# Altium PCB SeaTurtleIO.PcbDoc
Units mm, origin at the board's own origin, x right, y up, seen from the top; angles counter-clockwise.
Board outline 85 x 85 mm, 4 copper layers (Top Layer, Mid Layer 1, MId Layer 2, Bottom Layer), stack 0.778 mm thick; 117 components, 82 nets, 381 pads, 202 vias.
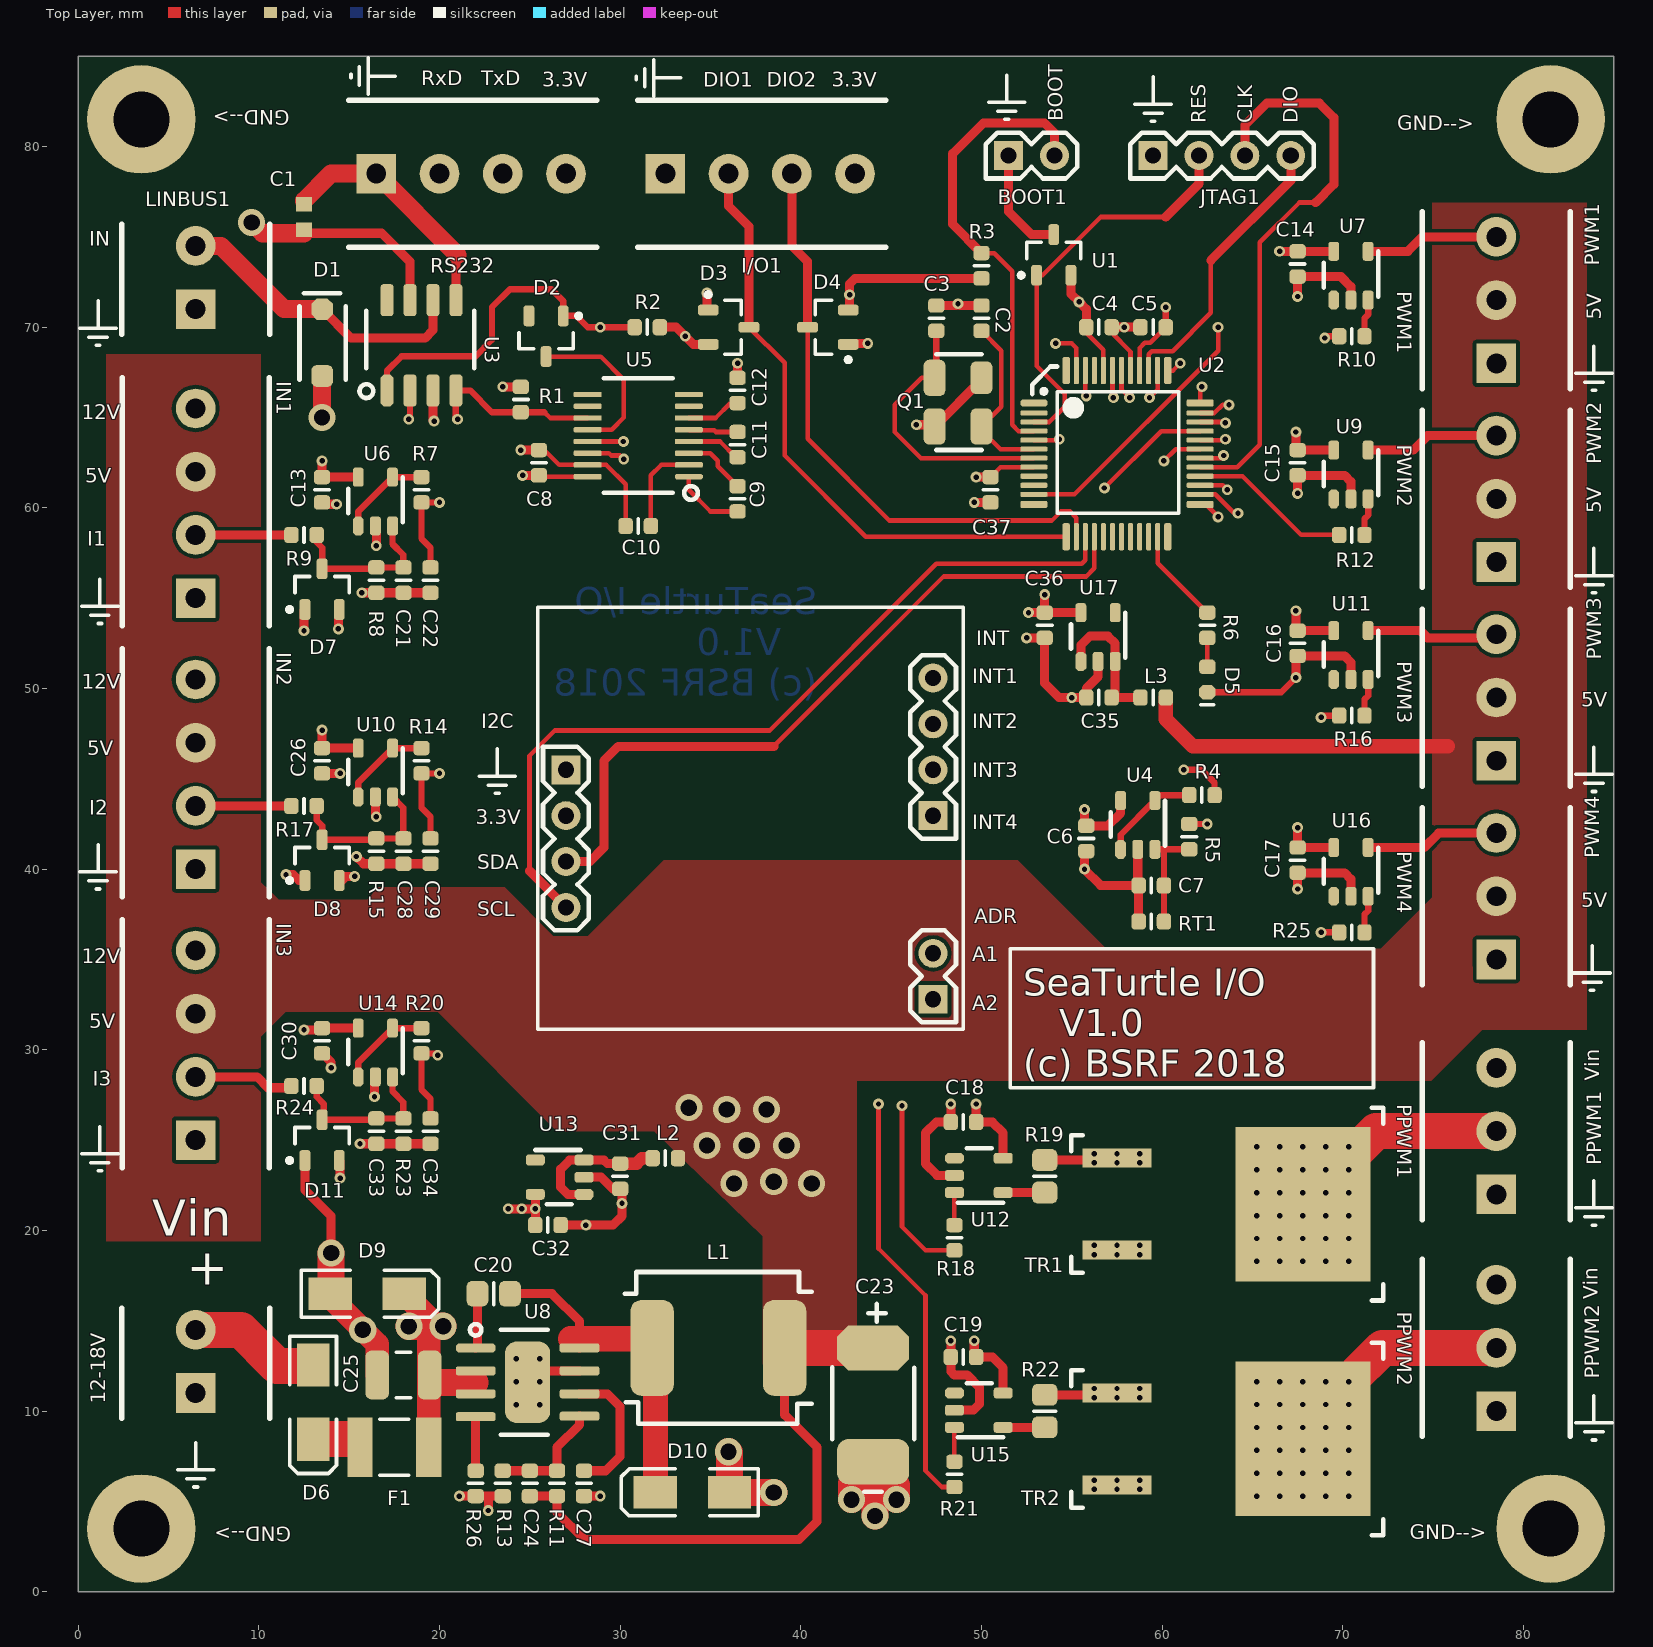
[diagram p0: Top Layer view]
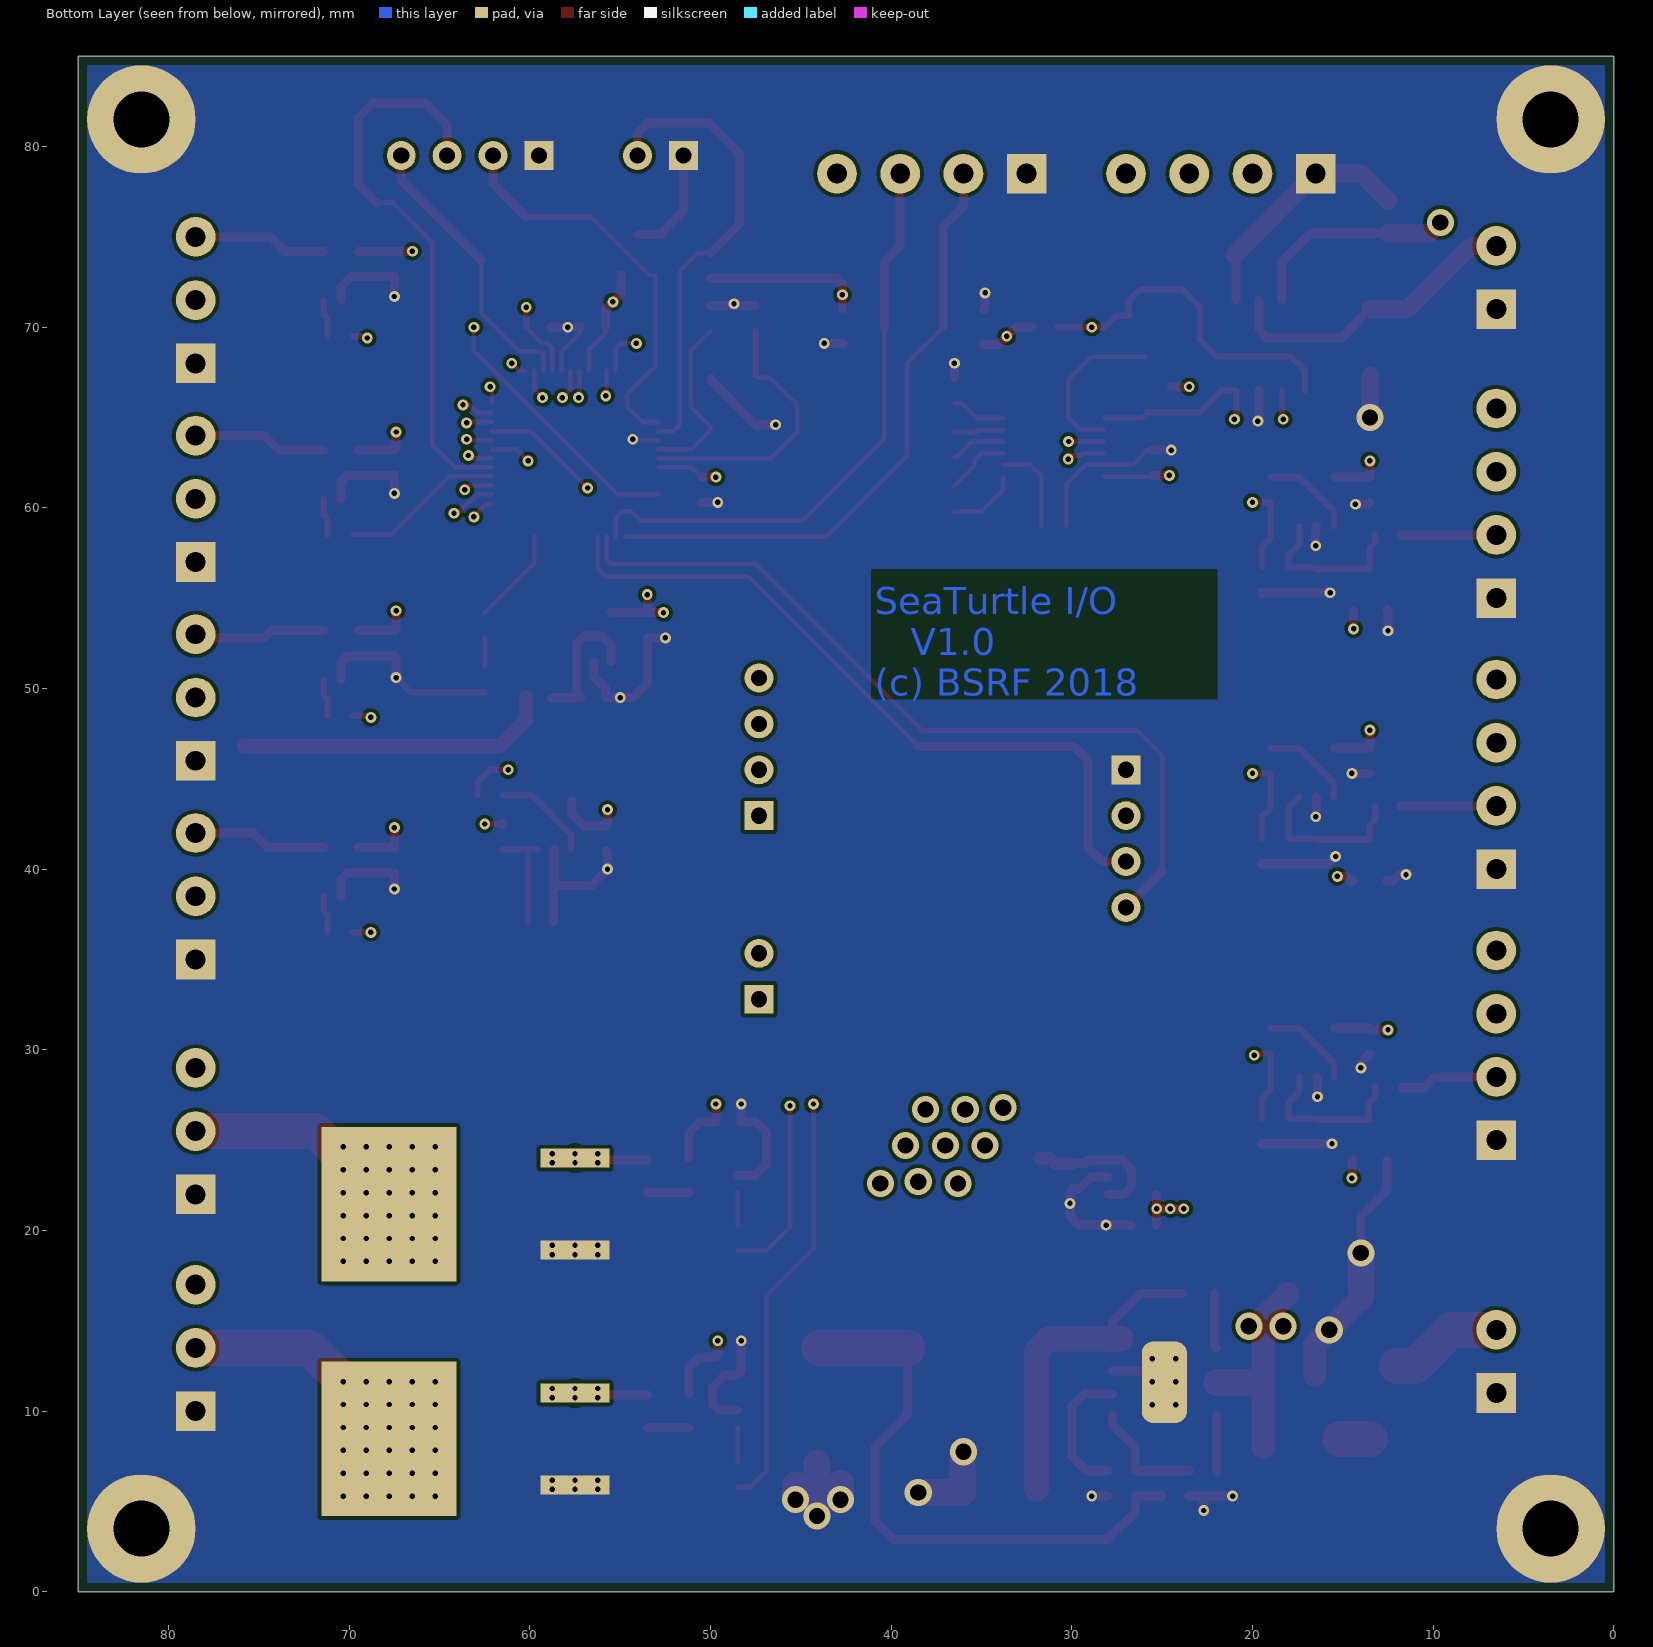
[diagram p1: Bottom Layer view, seen from below]
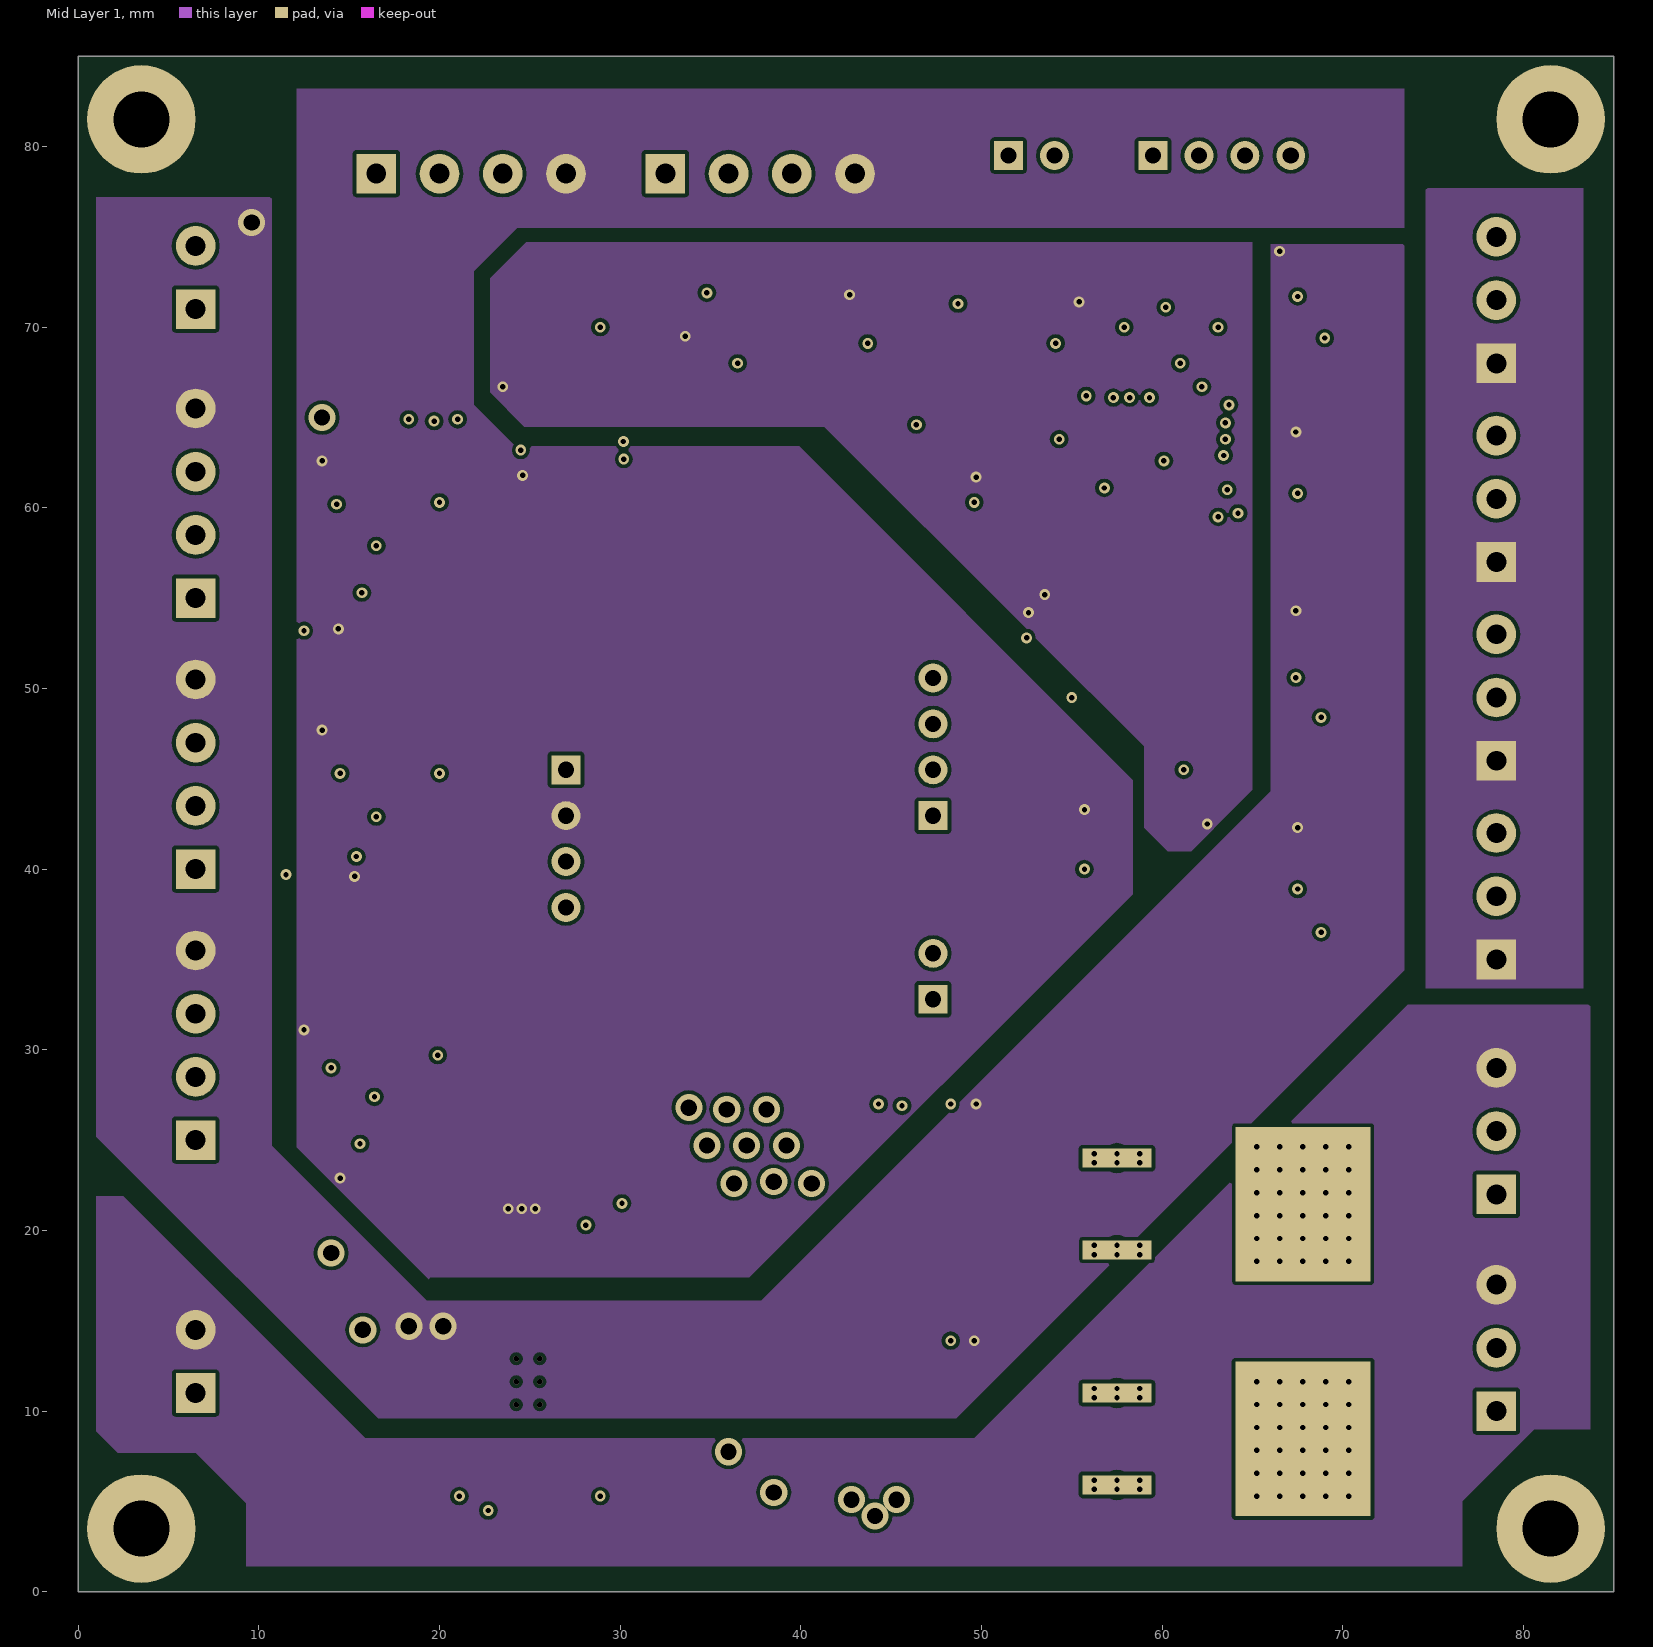
[diagram p2: Mid Layer 1]
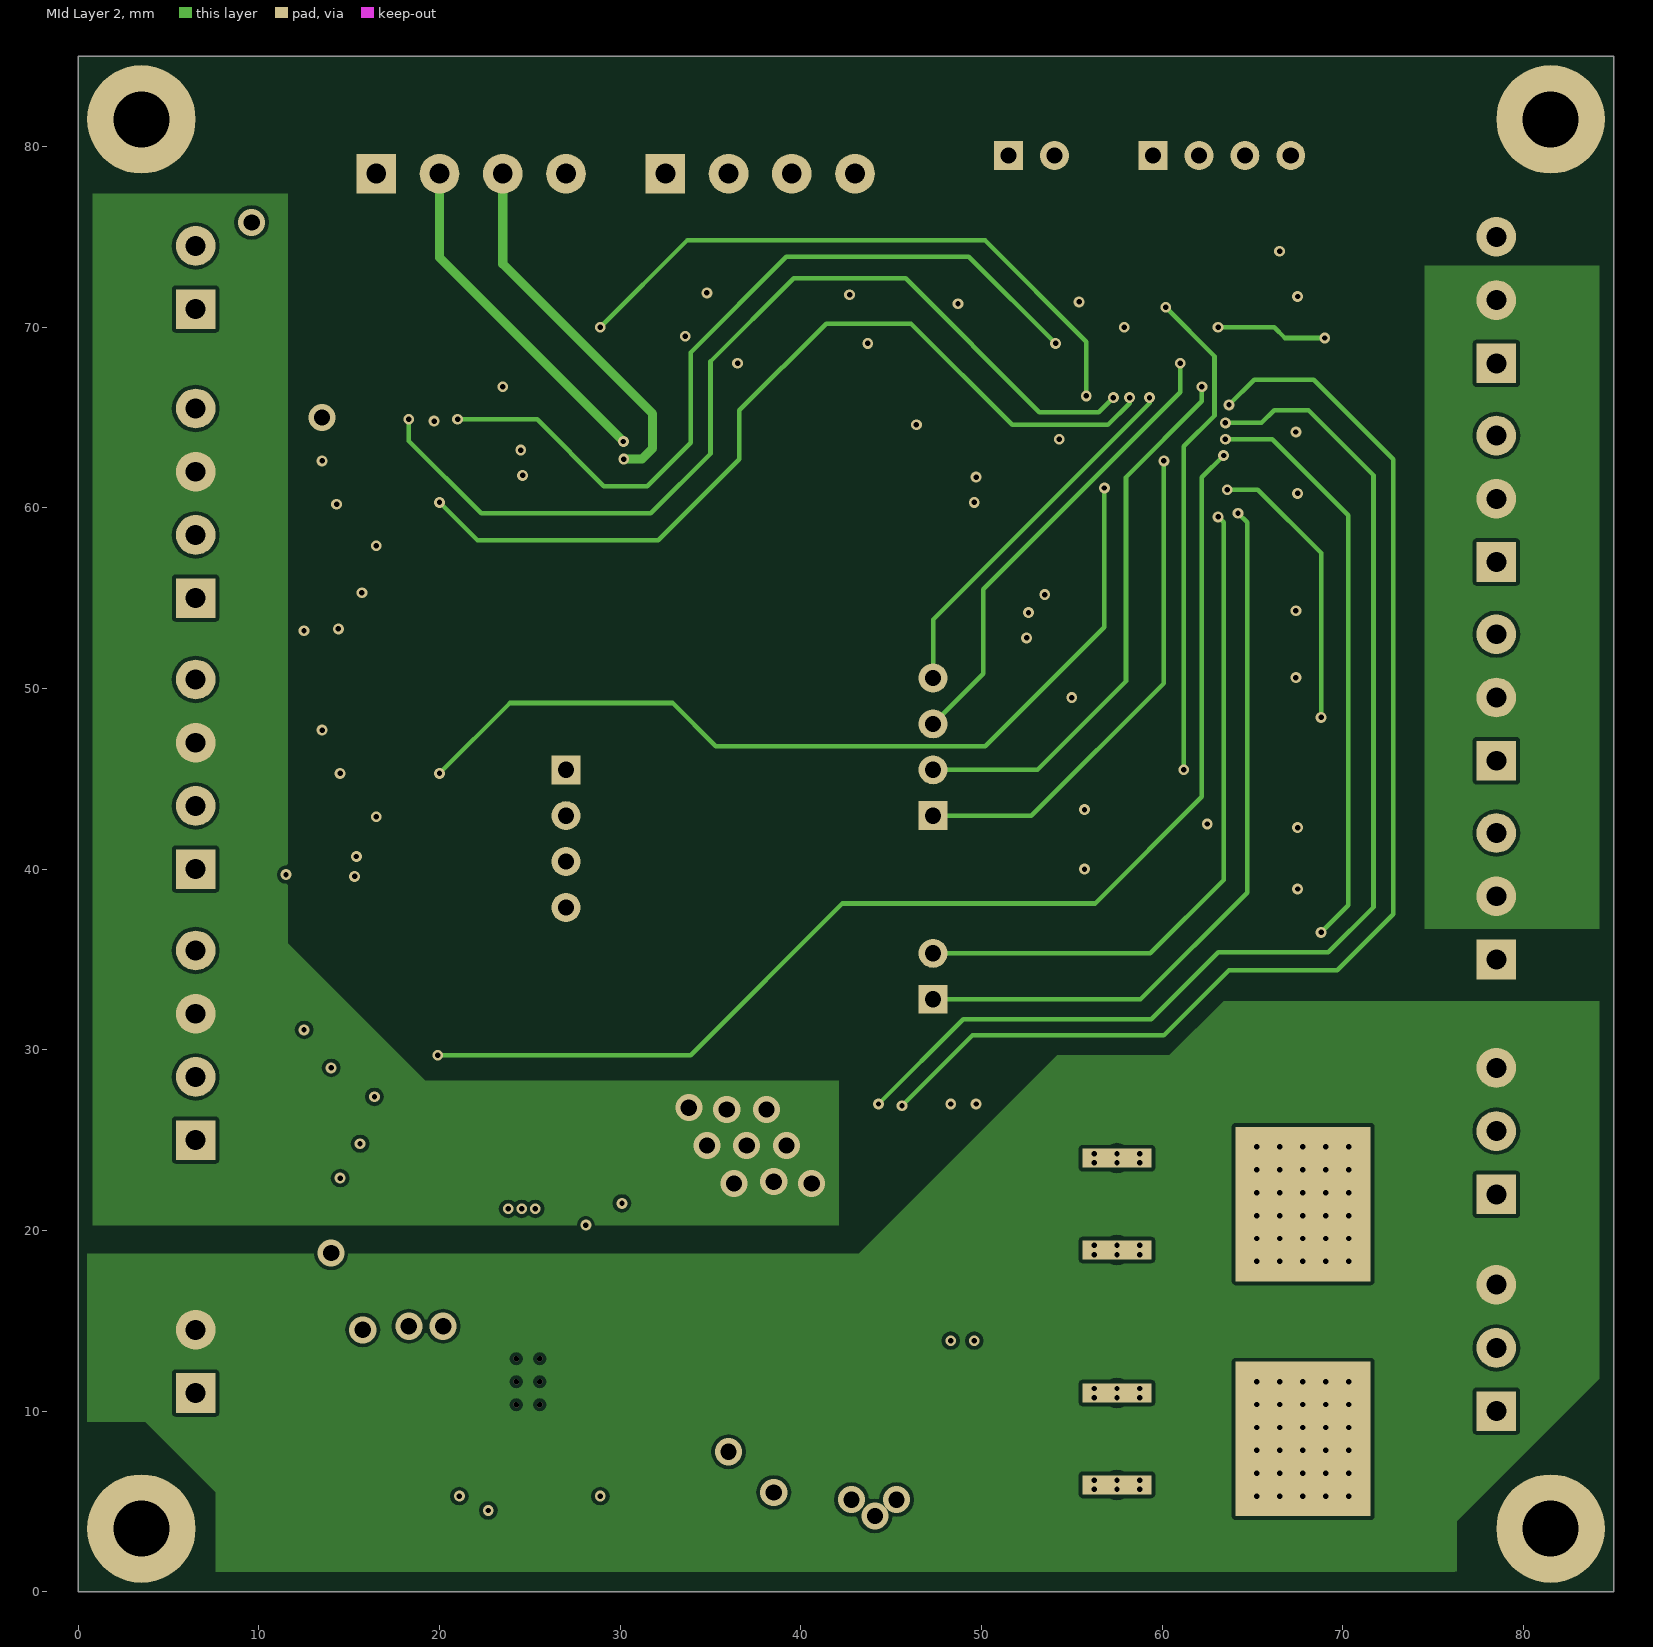
[diagram p3: MId Layer 2]

## Layer stack, top to bottom
Top Solder: solder mask 0.0102, Solder Resist, Dk 3.5
Top Layer: signal copper 0.0356
Dielectric 1: core 0.254, FR-4, Dk 4.2
Mid Layer 1: signal copper 0.036
Dielectric 4: prepreg 0.127, Dk 4.2
MId Layer 2: signal copper 0.036
Dielectric 3: core 0.254, Dk 4.2
Bottom Layer: signal copper 0.0356
Bottom Solder: solder mask 0.0102, Solder Resist, Dk 3.5

## Board outline
0,0 0,85 85,85 85,0

## Design rules (kind name [scope] priority, off if disabled: settings)
Clearance [All] p1: gap=0.2 ignorepadtopadclearanceinfootprint=TRUE
PolygonConnect PolygonConnect_2 [All vs IsNamedPolygon('Mid1_GND')] p1: connectstyle=Direct reliefconductorwidth=0.254 reliefentries=4 polygonreliefangle="90 Angle" airgapwidth=0.254
PolygonConnect PolygonConnect_1 [All vs IsNamedPolygon('MID1_12V') Or  IsNamedPolygon('Mid1_5V_3') Or  IsNamedPolygon('Mid1_5V_2') Or  IsNamedPolygon('Top_5V_2') Or  IsNamedPolygon('Bottom_GND') Or  IsNamedPolygon('MID1_3.3V_PER') Or  IsNamedPolygon('MID1_3.3V_CPU') Or  IsNamedPolygon('Top_5_1') Or  IsNamedPolygon('Mid1_5V_1') Or  IsNamedPolygon('Mid1_Vin')] p2: connectstyle=Direct reliefconductorwidth=0.254 reliefentries=4 polygonreliefangle="90 Angle" airgapwidth=0.254
PolygonConnect [All] p3: connectstyle=Relief reliefconductorwidth=0.254 reliefentries=4 polygonreliefangle="90 Angle" airgapwidth=0.254
RoutingVias [All] p1: holewidth=0.711 width=1.27 viastyle="Through Hole" minholewidth=0.711 minwidth=1.27 maxholewidth=0.711 maxwidth=1.27
SolderMaskExpansion [All] p1: expansion=0.102
Width [All] p1: maxlimit=2 minlimit=0.2 preferedwidth=0.254
30 further rules are at their usual default settings.

## Components (designator, comment, footprint, x,y, rotation, side; value= is the part's Value field where it differs from the comment)
ADR "2.54mm HEADER 2 PIN" CON-SRS-2-0254 47.32,32.8 r90 top locked
BOOT1 "2.54mm HEADER 2 PIN" CON-SRS-2-0254 51.5,79.5 r0 top
C1 "10uF" 1608[0603]#1 12.5,76.1 r90 top
C2 "10pF" 1608[0603]#2 50,70.5 r270 top
C3 "10pF" 1608[0603]#2 47.5,70.5 r270 top
C4 "10uF" 1608[0603]#2 56.5,70 r0 top
C5 "10uF" 1608[0603]#2 59.5,70 r0 top
C6 "10uF" 1608[0603]#2 55.8,41.7 r270 top
C7 "10uF" 1608[0603]#2 59.4,39.1 r180 top
C8 "10uF" 1608[0603]#2 25.5,62.5 r90 top
C9 "100nF" 1608[0603]#2 36.5,60.5 r270 top
C10 "100nF" 1608[0603]#2 31,59 r0 top
C11 "100nF" 1608[0603]#2 36.5,63.5 r270 top
C12 "100nF" 1608[0603]#2 36.5,66.5 r270 top
C13 "10uF" 1608[0603]#2 13.5,61 r270 top
C14 "10uF" 1608[0603]#2 67.5,73.5 r270 top
C15 "10uF" 1608[0603]#2 67.5,62.5 r270 top
C16 "10uF" 1608[0603]#2 67.5,52.5 r270 top
C17 "10uF" 1608[0603]#2 67.5,40.5 r270 top
C18 "10uF" 1608[0603]#2 49,26 r180 top
C19 "10uF" 1608[0603]#2 49,13 r180 top
C20 "100nF" 0805_N_2 23,16.5 r0 top
C21 "10uF" 1608[0603]#2 18,56 r270 top
C22 "10uF" 1608[0603]#2 19.5,56 r270 top
C23 "200uF" TANT_CASE_E 44,13.5 r270 top
C24 "270pF" 1608[0603]#2 25,6 r90 top
C25 "10uF" C1210_N 18,12 r180 top
C26 "10uF" 1608[0603]#2 13.5,46 r270 top
C27 "8.2nF" 1608[0603]#2 28,6 r270 top
C28 "10uF" 1608[0603]#2 18,41 r270 top
C29 "10uF" 1608[0603]#2 19.5,41 r270 top
C30 "10uF" 1608[0603]#2 13.5,30.5 r270 top
C31 "10uF" 1608[0603]#2 30,23 r270 top
C32 "10uF" 1608[0603]#2 26,20.3 r0 top
C33 "10uF" 1608[0603]#2 16.5,25.5 r270 top
C34 "10uF" 1608[0603]#2 19.5,25.5 r270 top
C35 "10uF" 1608[0603]#2 56.5,49.5 r180 top
C36 "10uF" 1608[0603]#2 53.5,53.5 r270 top
C37 "10uF" 1608[0603]#2 50.5,61 r90 top
D1 "BZT52C43" SOD123 13.5,71 r270 top
D2 "BAT54" SOT-23_N 25.9,69.5 r270 top
D3 "BAS70-4" SOT-23_N 36,70 r0 top
D4 "BAS70-4" SOT-23_N 41.5,70 r180 top
D5 "LED 0603" LED608L 62.5,50.5 r90 top
D6 "B260A" SMA 13,10.5 r270 top
D7 "BAS70-4" SOT-23_N 13.5,55.5 r90 top
D8 "BAS70-4" SOT-23_N 13.5,40.5 r90 top
D9 "SMAJ 15V" SMA 16,16.5 r0 top
D10 "B260A" SMA 34,5.5 r180 top
D11 "BAS70-4" SOT-23_N 13.5,25 r90 top
F1 "FUSE" CAPC4532L 17.5,8 r180 top
I2C "2.54mm HEADER 4 PIN" con-srs-4-0254 27,45.5 r270 top locked
I/O1 "2.54mm HEADER 4 PIN" 284391-4 32.5,78.5 r0 top
IN1 "2.54mm HEADER 4 PIN" 284391-4 6.5,55 r90 top
IN2 "2.54mm HEADER 4 PIN" 284391-4 6.5,40 r90 top
IN3 "2.54mm HEADER 4 PIN" 284391-4 6.5,25 r90 top
INT "2.54mm HEADER 4 PIN" con-srs-4-0254 47.32,42.96 r90 top locked
JTAG1 "2.54mm HEADER 4 PIN" con-srs-4-0254 59.5,79.5 r0 top
L1 "SRU1038A-6R2Y" "3232DZ (3232)" 39,13.5 r180 top
L2 "FB 1K" 1608[0603]#2 32.5,24 r180 top
L3 "FB 1K" 1608[0603]#2 59.5,49.5 r180 top
LINBUS1 "2.54mm HEADER 2 PIN" 284391-2 6.5,71 r90 top
PPWM1 "HEADER 3P S MALE" 284391-3 78.5,22 r90 top
PPWM2 "HEADER 3P S MALE" 284391-3 78.5,10 r90 top
PWM1 "HEADER 3P S MALE" 284391-3 78.5,68 r90 top
PWM2 "HEADER 3P S MALE" 284391-3 78.5,57 r90 top
PWM3 "HEADER 3P S MALE" 284391-3 78.5,46 r90 top
PWM4 "HEADER 3P S MALE" 284391-3 78.5,35 r90 top
Q1 "G-CRYS-Q12.000 MHz" "QUARTZ SMD QKT (QKT)" 50,64.5 r90 top
R1 "1K5" 1608[0603]#2 24.5,66 r270 top
R2 "1K5" 1608[0603]#2 31.5,70 r180 top
R3 "10K" 1608[0603]#2 50,73.4 r90 top
R4 "27R" 1608[0603]#2 62.2,44.1 r0 top
R5 "10K" 1608[0603]#2 61.5,41.8 r90 top
R6 "1K" 1608[0603]#2 62.5,53.5 r270 top
R7 "27R" 1608[0603]#2 19,61 r270 top
R8 "1K" 1608[0603]#2 16.5,56 r270 top
R9 "1K" 1608[0603]#2 12.5,58.5 r0 top
R10 "300R" 1608[0603]#2 70.5,69.5 r0 top
R11 "68K" 1608[0603]#2 26.5,6 r270 top
R12 "300R" 1608[0603]#2 70.5,58.5 r0 top
R13 "12K" 1608[0603]#2 23.5,6 r90 top
R14 "27R" 1608[0603]#2 19,46 r270 top
R15 "1K" 1608[0603]#2 16.5,41 r270 top
R16 "300R" 1608[0603]#2 70.5,48.5 r0 top
R17 "1K" 1608[0603]#2 12.5,43.5 r0 top
R18 "300R" 1608[0603]#2 48.5,19.6 r90 top
R19 "10R" 0805_N 53.5,23 r90 top
R20 "27R" 1608[0603]#2 19,30.5 r270 top
R21 "300R" 1608[0603]#2 48.5,6.5 r90 top
R22 "10R" 0805_N 53.5,10 r90 top
R23 "1K" 1608[0603]#2 18,25.5 r270 top
R24 "1K" 1608[0603]#2 12.5,28 r0 top
R25 "300R" 1608[0603]#2 70.5,36.5 r0 top
R26 "20.5К" 1608[0603]#2 22,6 r90 top value=20.5?
RS232 "2.54mm HEADER 4 PIN" 284391-4 16.5,78.5 r0 top
RT1 "10K THERMISTOR" 1608[0603]#2 59.4,37.1 r0 top
TR1 "CSD18536KTT" "TO-263 (D2PAK)" 57.5,24 r180 top
TR2 "CSD18536KTT" "TO-263 (D2PAK)" 57.5,11 r180 top
U1 "ADM1818" SOT-23_N 54,74 r90 top
U2 "LPC1115FBD48/303,1" LQFP48_N 57.5,63 r0 top locked
U3 "MCP2003-E/SN" "SO8 (REFLOW)" 19,69 r0 top
U4 "AD8541AKSZ" "S_SOT23-5 (REFLOW)" 57.7,41.1 r0 top
U5 "MAX3232E-Q1" TSSOP16 31,64 r90 top
U6 "AD8541AKSZ" "S_SOT23-5 (REFLOW)" 15.5,59 r0 top
U7 "UCC27519A-Q1" "S_SOT23-5 (REFLOW)" 69.5,71.5 r0 top
U8 "LMR14020" "S_SO8_POWER_PAD (wave)" 22,13.5 r270 top
U9 "UCC27519A-Q1" "S_SOT23-5 (REFLOW)" 69.5,60.5 r0 top
U10 "AD8541AKSZ" "S_SOT23-5 (REFLOW)" 15.5,44 r0 top
U11 "UCC27519A-Q1" "S_SOT23-5 (REFLOW)" 69.5,50.5 r0 top
U12 "UCC27519A-Q1" "S_SOT23-5 (REFLOW)" 48.5,24 r270 top
U13 "SPX3819M5-3.3V" "S_SOT23-5 (reflow)" 28,22 r90 top
U14 "AD8541AKSZ" "S_SOT23-5 (REFLOW)" 15.5,28.5 r0 top
U15 "UCC27519A-Q1" "S_SOT23-5 (REFLOW)" 48.5,11 r270 top
U16 "UCC27519A-Q1" "S_SOT23-5 (REFLOW)" 69.5,38.5 r0 top
U17 "SPX3819M5-3.3V" "S_SOT23-5 (reflow)" 55.5,51.5 r0 top
Vin "2.54mm HEADER 2 PIN" 284391-2 6.5,11 r90 top

## Footprints (in the part's own frame and the unit in brackets; to place one, negate y for a bottom-side part, rotate by r counter-clockwise, add the part's x,y. Pads: shape width x height; smd on the part's side, far side on the other; paste and mask are expansions set on the pad)
0805_N [mm] "Chip Resistor, Body 2.0x1.2mm, IPC Medium Density"
  rrect50% 1.2x1.4 smd: 1(-0.9,0) 2(0.9,0)
  silkscreen extent 0,-0.6 0,0.6
0805_N_2 [mm]
  rrect50% 1.2x1.4 smd: 1(-0.9,0) 2(0.9,0)
  silkscreen extent 0,-0.6 0,0.6
1608[0603]#1 [mm] "Chip Capacitor, Body 1.6x0.8mm, IPC High Density"
  rect 0.8x0.9 smd: 1(-0.7,0) 2(0.7,0)
  body extent -0.87,-0.48 0.87,0.48, height 1.3
1608[0603]#2 [mm] "Chip Capacitor, Body 1.6x0.8mm, IPC High Density"
  rrect50% 0.8x0.9 smd: 1(-0.7,0) 2(0.7,0)
  silkscreen extent 0,-0.4 0,0.4
"3232DZ (3232)" [mm]
  rrect50% 2.4x5.3 smd paste-0.1 mask+0.1: 1(-0.1,0) 2(7.23,0)
  silkscreen extent -1.6,-4.2 8.75,4.2
284391-2 [mm] "3.5mm terminal block 2-pin"
  rect 2.2x2.2 hole 1.1: 1(0,0)
  round 2.2 hole 1.1: 2(3.5,0)
  silkscreen extent -1.4,-4.1 4.7,4.1
284391-3 [mm] "3.5mm terminal block 3-pin"
  rect 2.2x2.2 hole 1.1: 1(0,0)
  round 2.2 hole 1.1: 2(3.5,0) 3(7,0)
  silkscreen extent -1.4,-4.1 8.4,4.1
284391-4 [mm] "3.5mm terminal block 3-pin"
  rect 2.2x2.2 hole 1.1: 1(0,0)
  round 2.2 hole 1.1: 2(3.5,0) 3(7,0) 4(10.5,0)
  silkscreen extent -1.52,-4.06 12.19,4.06
C1210_N [mm] "Chip Capacitor, Body 3.2x2.5mm, IPC Medium Density"
  rrect50% 1.3x2.7 smd: 1(-1.45,0) 2(1.45,0)
  silkscreen extent -0.4,-1.25 0.4,1.25
CAPC4532L [mm] "Chip Capacitor, Body 4.5x3.2mm, IPC High Density"
  rect 1.4x3.3 smd: 1(-1.9,0) 2(1.9,0)
  silkscreen extent -0.8,-1.55 0.8,1.55, body extent -2.4,-1.7 2.4,1.7, height 1.4
CON-SRS-2-0254 [mil]
  rect 63x63 hole 35.43 paste+0 mask+5: 1(0,0)
  round 63 hole 35.43 paste+0 mask+8: 2(100,0)
  silkscreen extent -50,-50 150,50
con-srs-4-0254 [mil]
  rect 63x63 hole 35.43 paste+0 mask+8: 1(0,0)
  round 63 hole 35.43 paste+0 mask+8: 2(100,0) 3(200,0) 4(300,0)
  silkscreen extent -50,-50 350,50
LED608L [mm] "Chip LED, Body 1.6x0.8mm, IPC High Density"
  oct 0.8x0.9 smd: 1(-0.7,0)
  rrect50% 0.8x0.9 smd: 2(0.7,0)
  silkscreen extent -1.4,-0.35 -1.4,0.35
LQFP48_N [mm] "Thin QFP, 48-Leads, Body 7x7mm, Pitch 0.5mm, IPC Medium Density"
  oct 1.5x0.4 smd paste+0: 1(-4.6,2.81)
  rrect50% 1.5x0.28 smd paste+0: 2(-4.6,2.25) 3(-4.6,1.75) 4(-4.6,1.25) 5(-4.6,0.75) 6(-4.6,0.25) 7(-4.6,-0.25) 8(-4.6,-0.75) 9(-4.6,-1.25) 10(-4.6,-1.75) 11(-4.6,-2.25) 26(4.6,-2.25) 27(4.6,-1.75) 28(4.6,-1.25) 29(4.6,-0.75) 30(4.6,-0.25) 31(4.6,0.25) 32(4.6,0.75) 33(4.6,1.25) 34(4.6,1.75) 35(4.6,2.25)
  rrect50% 1.5x0.4 smd paste+0: 12(-4.6,-2.81) 25(4.6,-2.81) 36(4.6,2.81)
  rrect50% 0.4x1.5 smd paste+0: 13(-2.81,-4.6) 24(2.81,-4.6) 37(2.81,4.6) 48(-2.81,4.6)
  rrect50% 0.28x1.5 smd paste+0: 14(-2.25,-4.6) 15(-1.75,-4.6) 16(-1.25,-4.6) 17(-0.75,-4.6) 18(-0.25,-4.6) 19(0.25,-4.6) 20(0.75,-4.6) 21(1.25,-4.6) 22(1.75,-4.6) 23(2.25,-4.6) 38(2.25,4.6) 39(1.75,4.6) 40(1.25,4.6) 41(0.75,4.6) 42(0.25,4.6) 43(-0.25,4.6) 44(-0.75,4.6) 45(-1.25,4.6) 46(-1.75,4.6) 47(-2.25,4.6)
  silkscreen extent -4.7,-3.3 3.43,4.83
"QUARTZ SMD QKT (QKT)" [mm]
  rrect50% 2x1.2 smd paste+0 mask+0.127: 1(0,0) 3(2.7,2.6) 4(0,2.6)
  rrect50% 1.8x1.2 smd paste+0 mask+0.127: 2(2.7,0)
  silkscreen extent -1.3,0 4,2.5
"S_SO8_POWER_PAD (wave)" [mm]
  oct 0.5x2.2 smd: 1(0,0)
  rrect50% 0.5x2.2 smd: 2(1.27,0) 3(2.54,0) 4(3.81,0) 5(3.781,5.75) 6(2.54,5.75) 7(1.27,5.75) 8(0,5.75)
  rrect50% 4.5x2.5 smd paste-2 mask-2: 9(1.9,2.875)
  rrect50% 4.5x2.5 smd far side paste-100: 9(1.9,2.875)
  silkscreen extent -1.32,-0.32 4.8,4
"S_SOT23-5 (REFLOW)" [mm]
  oct 0.6x1.05 smd: 1(0,0)
  rrect50% 0.6x1.05 smd: 2(0.95,0) 3(1.9,0) 4(1.9,2.7) 5(0,2.7)
  silkscreen extent -0.55,0.19 2.46,2.69
"S_SOT23-5 (reflow)" [mm]
  oct 0.6x1.05 smd: 1(0,0)
  rrect50% 0.6x1.05 smd: 2(0.95,0) 3(1.9,0) 4(1.9,2.7) 5(0,2.7)
  silkscreen extent -0.55,0.19 2.46,2.69
SMA [mm] "DO-214-AC/SMA; 2 C-Bend Leads; Body 5 x 2.7 mm, inc. leads (LxW)"
  rect 2.4x1.8 smd: 1(-2.05,0) 2(2.05,0)
  silkscreen extent -3.65,-1.3 3.95,1.3, body extent -2.92,-1.02 3.05,1.02, height 3
"SO8 (REFLOW)" [mm]
  oct 0.72x1.78 smd: 1(-1.905,-2.5)
  rrect50% 0.72x1.78 smd: 2(-0.635,-2.5) 3(0.635,-2.5) 4(1.905,-2.5) 5(1.905,2.5) 6(0.635,2.5) 7(-0.635,2.5) 8(-1.905,2.5)
  silkscreen extent -3.43,-2.92 2.92,1.91
SOD123 [mm]
  oct 1.2x1.2 smd paste-0.1 mask+0.1: 1(0,0)
  rrect50% 1.2x1.2 smd paste-0.1 mask+0.1: 2(3.7,0)
  silkscreen extent -0.89,-1.25 3.9,1.3
SOT-23_N [mm] "SOT23, 3-Leads, Body 2.9x1.3mm, Pitch 0.95mm, Lead Span 2.5mm, IPC Medium Density"
  rrect50% 1.15x0.6 smd: 1(-1.125,0.95) 2(-1.125,-0.95) 3(1.125,0)
  silkscreen extent -1.25,-1.5 0.7,1.93
TANT_CASE_E [mm]
  oct 2.5x4 smd paste-0.05 mask+0.1: 1(0,0)
  rrect50% 2.5x4 smd paste-0.05 mask+0.1: 2(6.3,0)
  silkscreen extent -2.43,-2.27 7.97,2.27
"TO-263 (D2PAK)" [mm]
  rect 3.82x1.05 all layers, no hole paste+0 mask+0.102: 1(0,0) 3(0,5.08)
  rect 7.48x8.55 all layers, no hole paste+0 mask+0.102: 2(-10.3,2.54)
  silkscreen extent -14.73,-2.79 2.54,7.87
TSSOP16 [mm]
  oct 0.3x1.55 smd paste+0: 1(-2.275,-2.8)
  rrect50% 0.3x1.55 smd paste+0: 2(-1.625,-2.8) 3(-0.975,-2.8) 4(-0.325,-2.8) 5(0.325,-2.8) 6(0.975,-2.8) 7(1.625,-2.8) 8(2.275,-2.8) 9(2.275,2.8) 10(1.625,2.8) 11(0.975,2.8) 12(0.325,2.8) 13(-0.325,2.8) 14(-0.975,2.8) 15(-1.625,2.8) 16(-2.275,2.8)
  silkscreen extent -3.56,-3.3 3.17,1.91

## Part data
ADR BOOT1 LINBUS1 Vin: library part "HEADER 2P S MALE", "HEADER SINGLE ROW 2P STRAIGHT MALE", (OldCtfName)=(CTF_OLD_NAME_INVALID), Elec_type=ON_BOARD_CONNECTOR
C1 C8 C14 C15 C16 C17 C18 C19 C25: library part C100n-10%-0603, "10uF Surface mount CAP 1210 10% 25V", Tolerance=10%, Voltage=25V, (OldCtfName)=(CTF_OLD_NAME_INVALID)
C2 C3: library part C10-10%-0603, "10pF Surface mount CAP 10% 25V", Tolerance=10%, Voltage=25V, (OldCtfName)=(CTF_OLD_NAME_INVALID)
C4 C5 C21 C22 C28 C29 C33 C34: library part C10u-10%-0805, "10uF Surface mount CAP 0603 10% 25V", Tolerance=10%, Voltage=25V, (OldCtfName)=(CTF_OLD_NAME_INVALID)
C6 C13 C26 C30 C31 C32 C35 C36: library part C100n-10%-0603, "10uF Surface mount CAP 0603 10% 25V", Tolerance=10%, Voltage=25V, (OldCtfName)=(CTF_OLD_NAME_INVALID)
C7 C37: library part C10u-10%-0805, "10uF Surface mount CAP 1210 10% 25V", Tolerance=10%, Voltage=25V, (OldCtfName)=(CTF_OLD_NAME_INVALID)
C9 C10 C11 C12 C20: library part C100n-10%-0603, "100nF Surface mount CAP 0603 10% 50V", Tolerance=10%, Voltage=50V, (OldCtfName)=(CTF_OLD_NAME_INVALID)
C23: library part C330uF-63V--Polar, "CAP, TANT, 200UF, 6.3V, CASE E", Tolerance=20%, Voltage=6.3V, (OldCtfName)=(CTF_OLD_NAME_INVALID)
C24: library part C100n-10%-0603, "270pF Surface mount CAP 0603 10% 35V", Tolerance=10%, Voltage=35V, (OldCtfName)=(CTF_OLD_NAME_INVALID)
C27: library part C100n-10%-0603, "8.2nF Surface mount CAP 0603 10% 35V", Tolerance=10%, Voltage=35V, (OldCtfName)=(CTF_OLD_NAME_INVALID)
D1: "ZENER DIODE 43V - BZT52C43", Manufacturer=DIODES, (OldCtfName)=(CTF_OLD_NAME_INVALID)
D2: library part "Diode BAT17", "Schottki Diode BAT54", ComponentLink1Description="Manufacturer Link", ComponentLink1URL=http://www.infineon.com/, ComponentLink2Description=Datasheet, ComponentLink2URL=http://www.infineon.com/upload/Document/cmc_upload/documents/009/363/bat17series.pdf, DatasheetVersion=Oct-1999, LatestRevisionDate=29-May-2009, LatestRevisionNote="IPC-7351 Footprint Added.", Note="Pin 2 is not connected and not drawn.", PackageDescription="3-Pin SOT-23 Package 0.95 mm Pitch, 2.5 mm Lead Span", PackageReference=SOT-23, PackageVersion=Sep-2001, Published=21-Mar-2003, Publisher="Altium Limited"
D3 D4 D7 D8 D11: library part "Diode BAS70-04", "Dual Schottky BAS70-4", ComponentLink1Description="Manufacturer Link", ComponentLink1URL=http://www.infineon.com/, ComponentLink2Description=Datasheet, ComponentLink2URL=http://www.infineon.com/upload/Document/cmc_upload/documents/009/363/bat17series.pdf, DatasheetVersion=Oct-1999, LatestRevisionDate=29-May-2009, LatestRevisionNote="IPC-7351 Footprint Added.", Note="Pin 2 is not connected and not drawn.", PackageDescription="3-Pin SOT-23 Package 0.95 mm Pitch, 2.5 mm Lead Span", PackageReference=SOT-23, PackageVersion=Sep-2001, Published=21-Mar-2003, Publisher="Altium Limited"
D5: library part KPT-1608SRC-PRV, "LED RED 0603 - KPT-1608SRC-PRV", Manufacturer=KINGBRIGHT, (OldCtfName)=(CTF_OLD_NAME_INVALID)
D6 D10: library part TVS_SMAJ15
D9: library part TVS_SMAJ15, "TVS"
F1: library part FUSE_1A, "FUSE POLISWITCH"
I2C I/O1 IN1 IN2 IN3 INT JTAG1 RS232: library part "HEADER 4P S MALE", "HEADER SINGLE ROW 4P STRAIGHT MALE", (OldCtfName)=(CTF_OLD_NAME_INVALID), Elec_type=ON_BOARD_CONNECTOR
L1: library part XAL4030-332-MEB, "SRU1038A-6R2Y- INDUCTOR 6.8uH", Tolerance=20%, (OldCtfName)=(CTF_OLD_NAME_INVALID), Elec_type=SRU1038A-6R2Y
L2 L3: library part XAL4030-332-MEB, "Ferrite Bead 1K 0603", Tolerance=20%, (OldCtfName)=(CTF_OLD_NAME_INVALID), Elec_type="ferrite bead"
PPWM1 PPWM2 PWM1 PWM2 PWM3 PWM4: "HEADER SINGLE ROW 3P STRAIGHT MALE", (OldCtfName)=(CTF_OLD_NAME_INVALID), Elec_type=ON_BOARD_CONNECTOR
Q1: library part Q-12MHz-QKT_SMD, "Crystal 12.000 MHz as per cx21", (OldCtfName)=(CTF_OLD_NAME_INVALID)
R1 R2: library part R1K5-1%-0805, "1K5 SMD 0603 1%", Tolerance=1%, (OldCtfName)=(CTF_OLD_NAME_INVALID), Wattage=0.125W
R3 R5: library part R10K-1%-0603, "10K SMD 0603 1%", Tolerance=1%, (OldCtfName)=(CTF_OLD_NAME_INVALID), Wattage=0.065W
R4 R7 R14 R20: library part R1K0-1%-0603, "27R SMD 0603 1%", Tolerance=1%, (OldCtfName)=(CTF_OLD_NAME_INVALID), Wattage=0.065W
R6: library part R2K0-1%-0603, "1K0 SMD 0603 1%", Tolerance=1%, (OldCtfName)=(CTF_OLD_NAME_INVALID), Wattage=0.065W
R8 R9 R15 R17 R23 R24: library part R1K0-1%-0603, "1K0 SMD 0603 1%", Tolerance=1%, (OldCtfName)=(CTF_OLD_NAME_INVALID), Wattage=0.065W
R10 R12 R16 R18 R21 R25: library part R1K0-1%-0603, "300R SMD 0603 1%", Tolerance=1%, (OldCtfName)=(CTF_OLD_NAME_INVALID), Wattage=0.065W
R11: library part R10K-1%-0603, "68K SMD 0603 1%", Tolerance=1%, (OldCtfName)=(CTF_OLD_NAME_INVALID), Wattage=0.065W
R13: library part R10K-1%-0603, "12K SMD 0603 1%", Tolerance=1%, (OldCtfName)=(CTF_OLD_NAME_INVALID), Wattage=0.065W
R19 R22: library part R33-1%-0805, "10R SMD 0805 1%", Tolerance=1%, (OldCtfName)=(CTF_OLD_NAME_INVALID), Wattage=0.25W
R26: library part R10K-1%-0603, "20.5? SMD 0603 1%", Tolerance=1%, (OldCtfName)=(CTF_OLD_NAME_INVALID), Wattage=0.065W
RT1: library part R10K-1%-0603, "10K SMD THERMISTOR NTCS0603E3103JHT 0603 1%", Tolerance=1%, (OldCtfName)=(CTF_OLD_NAME_INVALID), Wattage=0.065W
TR1 TR2: "N-CHANNEL MOSFET DPAK", Manufacturer=TI, (OldCtfName)=(CTF_OLD_NAME_INVALID)
U1: "MCU Reset IC ADM1818", DatasheetVersion=Oct-1999, LatestRevisionDate=29-May-2009, LatestRevisionNote="IPC-7351 Footprint Added.", Note="Pin 2 is not connected and not drawn.", PackageDescription="3-Pin SOT-23 Package 0.95 mm Pitch, 2.5 mm Lead Span", PackageReference=SOT-23, PackageVersion=Sep-2001, Published=21-Mar-2003
U2: library part LPC1114-LQFP-48, "NXP ARM 32BIT MPU", Manufacturer=NXP, (OldCtfName)=(CTF_OLD_NAME_INVALID)
U3: "LIN DRIVER MCP2003-E/SN", Manufacturer=MICROCHIP, (OldCtfName)=(CTF_OLD_NAME_INVALID)
U4 U6 U10 U14: "OPERATIONAL AMP AD8541AKSZ - SOT23", Manufacturer="ANALOG DEVICES", (OldCtfName)=(CTF_OLD_NAME_INVALID)
U5: library part MAX232D, "RS-232 TRANSCEIVER", Manufacturer=TEXAS, thm_power_diss=0.2275, (OldCtfName)=(CTF_OLD_NAME_INVALID)
U7 U9 U11 U12 U15 U16: "MOSFET gate driver"
U8: "4-40V to 3.3V Buck", Manufacturer=TI, (OldCtfName)=(CTF_OLD_NAME_INVALID)
U13 U17: library part SPX1819M5-3.3V, "POS VOLTAGE REGULATOR FIXED 3.3V", Manufacturer=EXAR, (OldCtfName)=(CTF_OLD_NAME_INVALID)

## Free pads (board coordinates)
  round 6 hole 3.1: 1(3.5,3.5) 1(3.5,81.5) 1(81.5,3.5) 1(81.5,81.5)

## Via types
v1: diameter 0.6, hole 0.3, Top Layer to Bottom Layer, tented both sides, 92 vias
v2: diameter 0.3, hole 0.3, Top Layer to Bottom Layer, tented both sides, 90 vias
v3: diameter 1.5, hole 0.9, Top Layer to Bottom Layer, tented both sides, 20 vias

## Nets (pads, with @x,y where several pads share a name; then routed paths per layer and width w, separated by ;. In a path a pad name is that pad's centre, name@x,y a point inside that pad or via, vN(x,y) a via of type N, cw(c..) or ccw(c..) an arc to the next point about the centre after c; other vN are vias at no path point)
201: C2.2 Q1.1 U2.6 | length 9.7
  Top Layer w0.254: C2.2 51.1,68.7 51.1,65.6 Q1.1 50,64.3 51.05,63.25 U2.6
202: C3.2 Q1.3 U2.7 | length 15.1
  Top Layer w0.254: Q1.3 46.7,67.2 45.2,65.7 45.2,64.2 46.65,62.75 U2.7
  Top Layer w0.354: Q1.3@47.5,67.3 C3.2
214: D2.1 R2.2 U2.46 U3.1 | length 54.7
  Top Layer w0.25: U2.46 55.75,66.25 v1(55.8,66.2)
  Top Layer w0.35: U3.1 17.095,67.595 17.9,68.4 22,68.4 22.9,69.3 22.9,71.1 23.9,72.1 26.2,72.1 26.85,71.45 D2.1 27.575,70.625 28.2,70 R2.2
  MId Layer 2 w0.25: v1(28.9,70) 33.7,74.8 50.2,74.8 55.8,69.2 v1(55.8,66.2)
215: U2.43 U3.2 | length 56.8
  Top Layer w0.254: U2.43 57.25,66.15 v1(57.3,66.1)
  Top Layer w0.35: v1(18.3,64.9) 18.365,64.965 U3.2
  MId Layer 2 w0.254: v1(18.3,64.9) 18.3,63.7 22.3,59.7 31.7,59.7 35,63 35,68.1 39.6,72.7 45.8,72.7 53.2,65.3 56.5,65.3 v1(57.3,66.1)
216: R1.2 U2.47 U3.4 U5.11 | length 56.9
  Top Layer w0.254: 25.8,65.3 26.125,64.975 U5.11 ; v1(54.1,69.1) 55,69.1 55.25,68.85 U2.47
  Top Layer w0.35: v1(21,64.9) 20.905,64.995 U3.4 21.7,66.5 22.9,65.3 R1.2 25.8,65.3
  MId Layer 2 w0.254: v1(21,64.9) 25.4,64.9 29.1,61.2 31.5,61.2 33.9,63.6 33.9,68.6 39.2,73.9 49.3,73.9 v1(54.1,69.1)
220: D1.1 LINBUS1.2 U3.6 | length 17.1
  Top Layer w0.5: D1.1 15.1,69.4 19.2,69.4 19.635,69.835 U3.6
  Top Layer w1: LINBUS1.2 7.9,74.5 11.4,71 D1.1
271: C9.2 U5.1 | length 3.9
  Top Layer w0.254: U5.1 33.8,61 35,59.8 C9.2
272: C9.1 U5.3 | length 3.6
  Top Layer w0.254: U5.3 34.975,63.025 35.4,62.6 35.4,62.3 C9.1
273: C10.2 U5.2 | length 5.1
  Top Layer w0.254: C10.2 31.7,61.8 32.275,62.375 U5.2
275: C11.2 U5.4 | length 3.1
  Top Layer w0.254: U5.4 35.525,63.675 36.4,62.8 C11.2
276: C11.1 U5.5 | length 2.8
  Top Layer w0.254: U5.5 33.825,64.3 35.2,64.3 35.3,64.2 C11.1
277: C12.2 U5.6 | length 3
  Top Layer w0.254: U5.6 35.275,64.975 36.1,65.8 C12.2
279: D2.3 U5.12 | length 9.2
  Top Layer w0.254: D2.3 28.925,68.375 30.2,67.1 30.2,65 29.525,64.325 U5.12
ADR1: ADR.1 U2.26 | length 43.6
  Top Layer w0.254: U2.26 62.95,60.75 64,59.7 v1(64.2,59.7)
  MId Layer 2 w0.254: ADR.1 58.8,32.8 64.7,38.7 64.7,59.2 v1(64.2,59.7)
ADR2: ADR.2 U2.25 | length 39.3
  Top Layer w0.254: U2.25 62.41,60.19 v1(63.1,59.5)
  MId Layer 2 w0.254: ADR.2 59.34,35.34 63.4,39.4 63.4,59.2 v1(63.1,59.5)
GND: BOOT1.1 C1.2 C2.1 C3.1 C4.2 C5.1 C6.2 C7.2 C8.2 C10.1 C12.1 C13.2 C14.2 C15.2 C16.2 C17.2 C18.2 C19.2 C21.2 C22.2 C23.2 C25.2 C26.2 C27.2 C28.2 C29.2 C30.2 C31.2 C32.2 C33.2 C34.2 C35.2 C36.2 C37.1 D1.2 D3.1 D4.1 D5.1 D7.1 D8.1 D9.1 D10.1 D11.1 I2C.1 I/O1.1 IN1.1 IN2.1 IN3.1 JTAG1.1 LINBUS1.1 pad.1 PPWM1.1 PPWM2.1 PWM1.1 PWM2.1 PWM3.1 PWM4.1 Q1.2 Q1.4 R8.2 R13.1 R15.2 R23.2 R26.1 RS232.1 RT1.1 TR1.3 TR2.3 U1.3 U2.5 U2.41 U3.3 U3.5 U4.2 U5.15 U6.2 U7.2 U8.7 U8.9 U9.2 U10.2 U11.2 U12.2 U13.2 U14.2 U15.2 U16.2 U17.2 Vin.1 | length 161.5
  Top Layer w0.254: C8.2 25.8,63.2 26.625,62.375 U5.15 29.225,62.375 30.3,61.3 C10.1 ; U2.5 54.25,63.75 v1(54.3,63.8) ; C4.2 57.2,69.7 58.25,68.65 U2.41
  Top Layer w0.35: D5.1 66.6,49.8 v1(67.4,50.6)
  Top Layer w0.5: v1(11.5,39.7) 11.9,39.7 12.225,39.375 D8.1 ; v1(12.5,53.2) 12.5,54.325 D7.1 ; D11.1 12.55,22.25 14,20.8 v3(14,18.75) ; C30.2 14,29.3 v1(14,29) ; C26.2 v1(14.5,45.3) ; C13.2 13.6,60.2 v1(14.3,60.2) ; v1(15.4,40.7) 15.8,40.3 R15.2 C28.2 C29.2 ; v1(15.6,24.8) C33.2 R23.2 C34.2 ; v1(15.7,55.3) R8.2 C21.2 C22.2 ; v1(16.4,27.4) 16.4,28.45 U14.2 ; v1@16.45,42.95 U10.2 ; U6.2 16.5,58.95 v1(16.5,57.9) ; U3.3 19.635,64.865 v1(19.7,64.8) ; U3.5 20.905,73.905 21,74 ; v1(21.1,5.3) R26.1 22.7,5.3 ; v1(22.7,4.5) 22.7,5.3 ; R13.1 22.7,5.3 ; v1(24.5,63.2) C8.2 ; U8.9@24.875,11.6 25.505,12.23 U8.7 ; C32.2 29.6,20.3 30.1,20.8 v1(30.1,21.5) 30.1,22 29.9,22.2 C31.2 29.6,22.3 28.95,22.95 U13.2 ; C27.2 v1(28.9,5.3) ; v1(34.8,71.9) 34.8,71.025 D3.1 ; C12.1 v1(36.5,68) ; D4.1@42.675,69.1 v1(43.7,69.1) ; v1(46.4,64.6) 47.3,64.6 Q1.4 50,67.1 Q1.2 ; C3.1 48.6,71.2 v1(48.7,71.3) 48.8,71.2 C2.1 ; v1(48.3,13.9) C19.2 48.3,12.2 48.5,12 49.2,12 49.9,11.3 49.9,10.4 49.55,10.05 U15.2 ; v1(48.3,27) C18.2 47.5,26 46.9,25.4 46.9,23.7 47.55,23.05 U12.2 ; v1(49.6,60.3) C37.1 ; BOOT1.1 51.5,76.4 52.775,75.125 U1.3 ; v1(52.5,52.8) C36.2 53.5,50.3 54.3,49.5 v1(55,49.5) C35.2 55.8,50 56.45,50.65 U17.2 ; C6.2 55.7,40.9 v1(55.7,40) 56.6,39.1 C7.2 ; C4.2 v1(57.9,70) C5.1 ; U4.2 58.65,39.15 C7.2 ; RT1.1 C7.2 ; v1(67.4,50.6) 67.4,51.7 C16.2 70.1,51.8 70.45,51.45 U11.2 ; v1(67.5,38.9) C17.2 70.1,39.8 70.45,39.45 U16.2 ; v1(67.5,60.8) C15.2 70.1,61.8 70.45,61.45 U9.2 ; v1(67.5,71.7) C14.2 69.9,72.8 70.45,72.25 U7.2
  Top Layer w1: C1.2@12.5,77 14,78.5 RS232.1 21,74 ; v3@13.5,65.6 D1.2
  Top Layer w1.3: D9.1@13.95,16.3 v3(15.75,14.5) 16.55,13.7 C25.2
  Top Layer w1.4: D9.1@13.95,16.3 D9.1
  Top Layer w1.5: D9.1@14,16.75 v3(14,18.75) ; v3(36,7.75) 36.05,7.7 D10.1 v3(38.5,5.5) ; v3(42.8,5.1) C23.2@42.8,6 ; v3(44.1,4.2) C23.2@44.1,7.1 ; v3(45.3,5.1) 45.3,5.9
  other v1: 28.1,20.3 16.5,42.9
  other v2: 56.23,5.666 57.5,5.666 58.77,5.666 56.23,6.174 57.5,6.174 58.77,6.174 24.25,10.35 25.55,10.35 24.25,11.62 25.55,11.62 24.25,12.89 25.55,12.89 56.23,18.666 57.5,18.666 58.77,18.666 56.23,19.174 57.5,19.174 58.77,19.174
  other v3: 13.5,65
I1: C22.1 R7.2 U2.42 | length 55.2
  Top Layer w0.254: U2.42 57.75,66.55 v1(58.2,66.1)
  Top Layer w0.35: C22.1 19.5,57.8 19,58.3 R7.2 v1(20,60.3)
  MId Layer 2 w0.254: v1(20,60.3) 22.1,58.2 32.1,58.2 36.6,62.7 36.6,65.4 41.4,70.2 46.1,70.2 51.7,64.6 57,64.6 58.2,65.8 v1(58.2,66.1)
I2: C29.1 R14.2 U2.33 | length 61.3
  Top Layer w0.254: v1(56.8,61.1) 59.95,64.25 U2.33
  Top Layer w0.35: C29.1 19.5,42.9 19,43.4 R14.2 v1(20,45.3)
  MId Layer 2 w0.254: v1(20,45.3) 23.9,49.2 32.9,49.2 35.3,46.8 50.2,46.8 56.8,53.4 v1(56.8,61.1)
I3: C34.1 R20.2 U2.30 | length 73.7
  Top Layer w0.254: U2.30 63.25,62.75 v1(63.4,62.9)
  Top Layer w0.35: C34.1 19.5,27.3 19,27.8 R20.2 19.8,29.8 v1(19.9,29.7)
  MId Layer 2 w0.254: v1(19.9,29.7) 33.9,29.7 42.3,38.1 56.3,38.1 62.2,44 62.2,61.7 v1(63.4,62.9)
INT1: INT.4 U2.38 | length 22.2
  Top Layer w0.254: v1(59.3,66.1) 59.75,66.55 U2.38
  MId Layer 2 w0.254: INT.4 47.32,53.82 59.3,65.8 v1(59.3,66.1)
INT2: INT.3 U2.37 | length 26.5
  Top Layer w0.254: U2.37 60.6,67.6 v1(61,68)
  MId Layer 2 w0.254: INT.3 50.1,50.82 50.1,55.5 61,66.4 v1(61,68)
INT3: INT.2 U2.36 | length 31.7
  Top Layer w0.254: U2.36 62.1,66.6 v1(62.2,66.7)
  MId Layer 2 w0.254: INT.2 53.1,45.5 58,50.4 58,61.7 62.2,65.9 v1(62.2,66.7)
INT4: INT.1 U2.31 | length 30.4
  Top Layer w0.254: v1(60.1,62.6) 60.75,63.25 U2.31
  MId Layer 2 w0.254: INT.1 52.76,42.96 60.1,50.3 v1(60.1,62.6)
IPH1H: R10.1 U2.11 | length 21.8
  Top Layer w0.254: U2.11 55.15,60.75 63.1,68.7 v1(63.1,70)
  Top Layer w0.35: v1(69,69.4) 69.1,69.5 R10.1
  MId Layer 2 w0.254: v1(63.1,70) 66.2,70 66.8,69.4 v1(69,69.4)
IPH1L: R25.1 U2.32 | length 34.7
  Top Layer w0.254: U2.32 63.45,63.75 v1(63.5,63.8)
  Top Layer w0.35: v1(68.8,36.5) R25.1
  MId Layer 2 w0.254: v1(63.5,63.8) 66.1,63.8 70.3,59.6 70.3,38 v1(68.8,36.5)
IPH2H: R16.1 U2.27 | length 18.4
  Top Layer w0.254: U2.27 63.35,61.25 v1(63.6,61)
  Top Layer w0.35: v1(68.8,48.4) 68.9,48.5 R16.1
  MId Layer 2 w0.254: v1(63.6,61) 65.3,61 68.8,57.5 v1(68.8,48.4)
IPH2L: R12.1 U2.28 | length 9
  Top Layer w0.254: U2.28 64.45,61.75 67.7,58.5 R12.1
IPH3H: R21.1 U2.34 | length 90.6
  Top Layer w0.254: v1(44.3,27) 44.3,19 46.9,16.4 46.9,6.7 47.8,5.8 R21.1 ; U2.34 63.45,64.75 v1(63.5,64.7)
  MId Layer 2 w0.254: v1(44.3,27) 49,31.7 59.4,31.7 63.1,35.4 69.2,35.4 71.7,37.9 71.7,61.8 68.1,65.4 66.2,65.4 65.5,64.7 v1(63.5,64.7)
IPH3L: R18.1 U2.35 | length 80.2
  Top Layer w0.254: v1(45.6,26.9) 45.6,20.2 46.9,18.9 R18.1 ; U2.35 62.894,65.25 63.344,65.7 v1(63.7,65.7)
  MId Layer 2 w0.254: v1(45.6,26.9) 49.5,30.8 60.1,30.8 63.7,34.4 69.7,34.4 72.8,37.5 72.8,62.7 68.4,67.1 65.1,67.1 v1(63.7,65.7)
NetBOOT1_2: BOOT1.2 R3.2 U2.4 | length 25.9
  Top Layer w0.254: R3.2 50.7,74.1 51.7,73.1 51.7,64.6 52.05,64.25 U2.4
  Top Layer w0.5: R3.2 48.4,75.7 48.4,79.6 50.1,81.3 53.5,81.3 54.04,80.76 BOOT1.2
NetC20_1: C20.1 U8.1 | length 3
  Top Layer w0.5: U8.1 22.1,13.6 C20.1
NetC20_2: C20.2 D10.2 L1.2 U8.8 | length 18.6
  Top Layer w0.5: C20.2 26.225,16.5 27.75,14.975 27.75,14 U8.8
  Top Layer w1.4: 27.25,14 27.75,14 31.27,14 L1.2 31.95,13.32 D10.2@31.95,5.7
NetC21_1: C21.1 D7.3 R8.1 R9.2 U6.3 | length 9.1
  Top Layer w0.35: R9.2 13.2,58.1 13.5,57.8 D7.3 16.425,56.625 R8.1 C21.1 18,57.4 17.4,58 U6.3
NetC24_2: C24.2 R11.1 R13.2 U8.5 | length 6.5
  Top Layer w0.5: R13.2 C24.2 R11.1 26.5,8 27.75,9.25 U8.5
NetC27_1: C27.1 U8.6 | length 7.6
  Top Layer w0.5: U8.6 29.29,10.96 30,10.25 30,7.5 29.2,6.7 C27.1
NetC28_1: C28.1 D8.3 R15.1 R17.2 U10.3 | length 9.1
  Top Layer w0.35: R17.2 13.2,42.7 13.5,42.4 D8.3 16.425,41.625 R15.1 C28.1 18,43.4 U10.3
NetC31_1: C31.1 L2.2 U13.1 U13.3 | length 8
  Top Layer w0.5: U13.1 27.1,22 26.7,22.4 26.7,23.4 27.2,23.9 U13.3 29.1,23.9 29.3,23.7 C31.1
  Top Layer w0.7: C31.1 30.9,23.7 31.2,24 L2.2
NetC33_1: C33.1 D11.3 R23.1 R24.2 U14.3 | length 9
  Top Layer w0.35: R24.2 13.2,27.4 13.6,27 D11.3@13.6,26.225 ; D11.3 16.425,26.125 C33.1 R23.1 18,27.1 17.4,27.7 U14.3
NetC35_1: C35.1 L3.2 U17.1 U17.3 | length 7.9
  Top Layer w0.5: U17.1 55.5,52.4 56,52.9 57,52.9 57.4,52.5 U17.3 57.4,49.7 C35.1 L3.2
NetD3_3: D3.3 I/O1.2 U2.13 | length 34.3
  Top Layer w0.254: D3.3 39.1,68.025 39.1,62.9 43.6,58.4 U2.13
  Top Layer w0.5: I/O1.2 36,76.7 37.125,75.575 D3.3
NetD4_3: D4.3 I/O1.3 U2.14 | length 33.2
  Top Layer w0.254: D4.3 40.375,63.825 44.9,59.3 53.9,59.3 54.4,59.8 54.9,59.8 55.25,59.45 U2.14
  Top Layer w0.5: I/O1.3 39.5,74.5 40.375,73.625 D4.3
NetD5_2: D5.2 R6.2 | length 1.6
  Top Layer w0.254: D5.2 R6.2
NetD6_2: D6.2 F1.2 | length 1.6
  Top Layer w2: D6.2@13.5,8.45 F1.2@15.15,8.45
NetIN1_2: IN1.2 R9.1 | length 5.3
  Top Layer w0.5: IN1.2 R9.1
NetIN2_2: IN2.2 R17.1 | length 5.3
  Top Layer w0.5: IN2.2 R17.1
NetIN3_2: IN3.2 R24.1 | length 5.4
  Top Layer w0.5: IN3.2 9.9,28.5 10.5,27.9 R24.1@11.7,27.9
NetPPWM1_2: PPWM1.2 TR1.2 | length 12.4
  Top Layer w2: TR1.2 71.84,25.5 PPWM1.2
  other v2: 65.247,18.285 66.517,18.285 67.787,18.285 69.057,18.285 70.327,18.285 65.247,19.555 66.517,19.555 67.787,19.555 69.057,19.555 70.327,19.555 65.247,20.825 66.517,20.825 67.787,20.825 69.057,20.825 70.327,20.825 65.247,22.095 66.517,22.095 67.787,22.095 69.057,22.095 70.327,22.095 65.247,23.365 66.517,23.365 67.787,23.365 69.057,23.365 70.327,23.365 65.247,24.635 66.517,24.635 67.787,24.635 69.057,24.635 70.327,24.635
NetPPWM2_2: PPWM2.2 TR2.2 | length 12.5
  Top Layer w2: v2(67.787,9.095) v2(69.057,10.365) v2(70.327,11.635) 72.192,13.5 PPWM2.2
  other v2: 65.247,5.285 66.517,5.285 67.787,5.285 69.057,5.285 70.327,5.285 65.247,6.555 66.517,6.555 67.787,6.555 69.057,6.555 70.327,6.555 65.247,7.825 66.517,7.825 67.787,7.825 69.057,7.825 70.327,7.825 65.247,9.095 66.517,9.095 69.057,9.095 70.327,9.095 65.247,10.365 66.517,10.365 67.787,10.365 70.327,10.365 65.247,11.635 66.517,11.635 67.787,11.635 69.057,11.635
NetPWM1_3: PWM1.3 U7.4 | length 7.4
  Top Layer w0.5: U7.4 73.6,74.2 74.4,75 PWM1.3
NetPWM2_3: PWM2.3 U9.4 | length 7.4
  Top Layer w0.5: U9.4 73.9,63.2 74.7,64 PWM2.3
NetPWM3_3: PWM3.3 U11.4 | length 7.3
  Top Layer w0.5: U11.4 74.3,53.2 74.7,52.8 78.3,52.8 PWM3.3
NetPWM4_3: PWM4.3 U16.4 | length 7.4
  Top Layer w0.5: U16.4 74.5,41.2 75.3,42 PWM4.3
NetR4_1: R4.1 U4.1 U4.4 | length 5.5
  Top Layer w0.35: U4.1 57.7,41.9 U4.4 59.9,44.1 R4.1
NetR6_1: R6.1 U2.23 | length 5.3
  Top Layer w0.254: U2.23@59.759,58.4 59.759,56.941 R6.1
NetR7_1: R7.1 U6.1 U6.4 | length 5.1
  Top Layer w0.35: U6.1 15.5,59.8 U6.4 R7.1
NetR10_2: R10.2 U7.3 | length 2.1
  Top Layer w0.35: R10.2 71.2,70.5 71.4,70.7 U7.3
NetR12_2: R12.2 U9.3 | length 2.1
  Top Layer w0.35: R12.2 71.2,59.4 71.4,59.6 U9.3
NetR14_1: R14.1 U10.1 U10.4 | length 5.1
  Top Layer w0.35: U10.1 15.5,44.8 U10.4 R14.1
NetR16_2: R16.2 U11.3 | length 2.1
  Top Layer w0.35: R16.2 71.2,49.4 71.4,49.6 U11.3
NetR18_2: R18.2 U12.3 | length 1.8
  Top Layer w0.254: R18.2 U12.3
NetR19_1: R19.1 U12.4 | length 2.3
  Top Layer w0.5: U12.4 R19.1
NetR19_2: R19.2 TR1.1 | length 4
  Top Layer w0.5: R19.2 57.4,23.9 TR1.1
  other v2: 56.23,23.746 57.5,23.746 58.77,23.746 56.23,24.254 57.5,24.254 58.77,24.254
NetR20_1: R20.1 U14.1 U14.4 | length 5.1
  Top Layer w0.35: U14.1 15.5,29.3 U14.4 R20.1
NetR21_2: R21.2 U15.3 | length 1.9
  Top Layer w0.254: R21.2 U15.3
NetR22_1: R22.1 U15.4 | length 2.3
  Top Layer w0.5: U15.4 R22.1
NetR22_2: R22.2 TR2.1 | length 4
  Top Layer w0.5: R22.2 57.4,10.9 TR2.1
  other v2: 56.23,10.746 57.5,10.746 58.77,10.746 56.23,11.254 57.5,11.254 58.77,11.254
NetR25_2: R25.2 U16.3 | length 2.1
  Top Layer w0.35: R25.2 71.2,37.5 71.4,37.7 U16.3
NetR26_2: R26.2 U8.4 | length 3
  Top Layer w0.5: R26.2 U8.4
P3V3_CPU: C4.1 C36.1 C37.2 D3.2 D4.2 R1.1 R2.1 R3.1 R5.2 U1.2 U2.8 U2.44 U17.5 | length 27.2
  Top Layer w0.254: C37.2 51.05,62.25 U2.8 ; C4.1 55.8,69.7 56.75,68.75 U2.44
  Top Layer w0.35: R5.2 v1(62.5,42.5)
  Top Layer w0.5: v1(23.5,66.7) R1.1 ; R2.1 33.1,70 v1(33.6,69.5) 34.05,69.05 D3.2 ; D4.2@42.7,71.025 v1(42.7,71.8) 42.7,72.4 43,72.7 R3.1 ; v1(49.7,61.7) C37.2 ; v1(52.6,54.2) C36.1 ; v1(53.5,55.2) C36.1 ; U1.2 54.95,71.85 v1(55.4,71.4) 55.8,71 C4.1 ; U17.5 C36.1
P3V3_PER: C6.1 C8.1 C13.1 C26.1 C30.1 C32.1 D7.2 D8.2 D11.2 I2C.2 I/O1.4 RS232.4 U4.5 U5.16 U6.5 U10.5 U13.5 U14.5 | length 22.7
  Top Layer w0.254: C8.1 25.575,61.725 U5.16
  Top Layer w0.5: v1(12.5,31.1) 13.4,31.1 C30.1 U14.5 ; v1(13.5,47.7) C26.1 U10.5 ; v1(13.5,62.6) C13.1 U6.5 ; v1(14.4,53.3) D7.2@14.4,54.325 ; D11.2 14.5,23.825 v1(14.5,22.9) ; D8.2 14.525,39.3 14.813,39.588 14.8,39.6 v1(15.3,39.6) ; v1(23.8,21.2) v1(25.3,21.2) ; v1(24.6,61.8) C8.1 ; C32.1 v1(25.3,21.2) ; U13.5 v1(25.3,21.2) ; v1(55.7,43.3) 55.7,42.5 C6.1 57,42.4 57.7,43.1 U4.5
  other v1: 24.55,21.2
P5V: C23.1 C24.1 IN1.3 IN2.3 IN3.3 L1.1 L2.1 L3.1 PWM1.2 PWM2.2 PWM3.2 PWM4.2 R11.2 | length 50.5
  Top Layer w0.5: C24.1 R11.2 26.5,4.4 28,2.9 39.9,2.9 40.9,3.9 40.9,8 39.1,9.8 L1.1
  Top Layer w0.8: L3.1 60.2,48.3 61.7,46.8 75.8,46.8
  Top Layer w2: L1.1 C23.1
  other v3: 36.3,22.6 40.6,22.6 38.5,22.7 34.8,24.7 37,24.7 39.2,24.7 35.9,26.7 38.1,26.7 33.8,26.8
P12V: C1.1 C14.1 C15.1 C16.1 C17.1 C18.1 C19.1 C25.1 D9.2 F1.1 IN1.4 IN2.4 IN3.4 U3.7 U7.5 U8.2 U8.3 U9.5 U11.5 U12.5 U15.5 U16.5 | length 45.5
  Top Layer w0.5: C1.1@12.5,75.2 16.8,75.2 18.365,73.635 U3.7 ; v1(49.6,13.9) 49.6,13.1 C19.1 50.6,13 51.2,12.4 U15.5 ; v1(49.7,27) C18.1 50.6,26 51.2,25.4 U12.5 ; v1(66.5,74.2) U7.5 ; v1(67.4,54.3) 67.4,53.3 C16.1 U11.5 ; C15.1@67.4,63.3 v1(67.4,64.2) ; v1(67.5,42.3) C17.1 U16.5 ; C15.1 U9.5
  Top Layer w1: v3(9.6,75.8) 10.2,75.2 C1.1@12.5,75.2
  Top Layer w1.3: D9.2 19.4,15.15 19.4,14.7 F1.1
  Top Layer w1.5: v3(18.3,14.7) 19.4,14.7 v3(20.2,14.7) ; C25.1@19.55,11.575 21.95,11.575
RESET: JTAG1.2 U1.1 U2.3 | length 22.6
  Top Layer w0.254: U2.3 53.75,64.75 54.6,65.6 54.6,66.3 53.05,67.85 U1.1 53.375,72.875 56.6,76.1 60.2,76.1
  Top Layer w0.5: 60.2,76.1 62.04,77.94 JTAG1.2
RXIN_232: RS232.2 U5.13 | length 21
  Top Layer w0.254: U5.13 v1(30.175,63.675)
  MId Layer 2 w0.5: RS232.2 20,73.85 v1(30.175,63.675)
SCL: I2C.4 U2.15 | length 45.8
  Top Layer w0.254: 24.98,39.9 24.98,46.28 26.377,47.677 38.277,47.677 47.5,56.9 55.558,56.9 55.75,57.092 U2.15
  Top Layer w0.5: 24.98,39.9 I2C.4
SDA: I2C.3 U2.16 | length 40.5
  Top Layer w0.254: 38.5,46.8 47.9,56.2 55.8,56.2 56.25,56.65 U2.16
  Top Layer w0.5: I2C.3 28.32,40.42 29.1,41.2 29.1,46 29.9,46.8 38.5,46.8
SWCLK: JTAG1.3 U2.29 | length 31.6
  Top Layer w0.254: U2.29 64.15,62.25 65.4,63.5 65.4,74.7 67.6,76.9 68.5,76.9
  Top Layer w0.5: JTAG1.3 64.58,81.18 65.8,82.4 68.7,82.4 69.5,81.6 69.5,77.9 68.5,76.9
SWDIO: JTAG1.4 U2.39 | length 15.8
  Top Layer w0.254: U2.39 59.25,68.508 59.419,68.677 60.577,68.677 62.7,70.8 62.7,73.7
  Top Layer w0.5: 62.7,73.7 67.12,78.12 JTAG1.4
TEMP: C5.2 R4.2 U2.40 | length 34.4
  Top Layer w0.254: U2.40 58.75,68.85 59.031,69.131 59.331,69.131 C5.2
  Top Layer w0.35: C5.2 v1(60.2,71.1) ; v1(61.2,45.5) 62.2,45.5 62.9,44.8 R4.2
  MId Layer 2 w0.254: v1(60.2,71.1) 62.9,68.4 62.9,65.1 61.2,63.4 v1(61.2,45.5)
TEMP_IN: C7.1 R5.1 RT1.2 U4.3 | length 5.9
  Top Layer w0.35: U4.3 60.2,41.1 ; RT1.2 C7.1 60.1,41 60.2,41.1 ; R5.1 60.2,41.1
TXOUT_232: RS232.3 U5.14 | length 22.6
  Top Layer w0.254: U5.14 29.375,63.025 29.5,62.9 30,62.9 v1(30.2,62.7)
  MId Layer 2 w0.5: RS232.3 23.5,73.5 31.8,65.2 31.8,63.3 31.2,62.7 v1(30.2,62.7)
Vin: D6.1 PPWM1.3 PPWM2.3 Vin.2 | length 6.3
  Top Layer w2: Vin.2 9,14.5 11,12.5 12,12.5
pads on no net: D2.2 U2.1 U2.2 U2.9 U2.10 U2.12 U2.17 U2.18 U2.19 U2.20 U2.21 U2.22 U2.24 U2.45 U2.48 U3.8 U5.7 U5.8 U5.9 U5.10 U7.1 U9.1 U11.1 U12.1 U13.4 U15.1 U16.1 U17.4

## Polygon pours and split planes (outlines as drawn)
P12V on Mid Layer 1 "MID1_12V" (solid, remove dead copper, pour order 2): 1,77.2 1,25.2 16.6,9.6 48.6,9.6 73.4,34.4 73.4,74.6 66,74.6 66,44.3 37.8,16.1 19.3,16.1 10.7,24.7 10.7,77.2
Vin on Mid Layer 1 "Mid1_Vin" (solid, pour order 20): 1,8.9 2.2,7.7 6.5,7.7 9.3,4.9 9.3,1.4 76.6,1.4 76.6,5 80.6,9 83.7,9 83.7,32.4 83.6,32.5 73.6,32.5 49.6,8.5 15.9,8.5 2.5,21.9 1,21.9
GND on Mid Layer 1 "Mid1_GND" (solid, pour order 22): 74.6,77.7 74.6,33.4 83.3,33.4 83.3,77.7
P3V3_PER on Mid Layer 1 "MID1_3.3V_PER" (solid, remove dead copper, pour order 4): 12.1,83.2 12.1,24.6 19.4,17.3 19.5,17.4 37.152,17.4 58.372,38.62 58.372,44.928 39.9,63.4 24.2,63.4 21.9,65.7 21.9,73.1 24.3,75.5 73.4,75.5 73.4,83.2 23.2,83.2
P3V3_CPU on Mid Layer 1 "MID1_3.3V_CPU" (solid, remove dead copper, pour order 6): 24.8,74.7 22.8,72.7 22.8,66.4 24.7,64.5 41.3,64.5 59,46.8 59,42.3 60.3,41 61.6,41 64.1,43.5 65,44.4 65,74.7
Vin on MId Layer 2 "Mid1_Vin" (solid, pour order 8): 0.5,18.7 0.5,9.4 3.7,9.4 7.6,5.5 7.6,1.1 76.2,1.1 76.3,1 76.3,3.9 84.2,11.8 84.2,32.7 63.4,32.7 60.4,29.7 54.2,29.7 43.2,18.7
P5V on MId Layer 2 "Mid1_5V_2" (solid, pour order 12): 74.535,36.7 84.2,36.7 84.2,73.4 74.535,73.4
P5V on MId Layer 2 "Mid1_5V_1" (solid, pour order 10): 0.8,20.3 42.1,20.3 42.1,28.3 19.2,28.3 11.603,35.897 11.603,77.4 0.8,77.4
P5V on Top Layer "Top_5_1" (solid, pour order 14): 1.55,19.4 10.1,19.4 10.1,68.5 1.55,68.5
P5V on Top Layer "Top_5V_2" (solid, pour order 16): 74.95,31.1 83.5,31.1 83.5,76.9 74.95,76.9
P5V on Top Layer "Mid1_5V_3" (solid, pour order 18): 9.5,39.9 11.1,38.3 16,38.3 16.6,39 23.6,39 26.3,36.3 28.2,36.3 32.4,40.5 52,40.5 56.9,35.6 72.1,35.6 75.5,39 78.3,31.7 74.9,28.3 51.3,28.3 43.1,28.3 43.1,12.6 37.9,12.6 37.9,19.67 31.881,25.5 26.5,25.5 19.9,32.1 11.5,32.1 9.5,30.1
GND on Bottom Layer "Bottom_GND" (solid, remove dead copper, pour order 0): 0.5,84.5 0.5,0.5 84.5,0.5 84.5,84.5

## Other copper
Bottom Layer:
  text "SeaTurtle I/O  /    V1.0 / (c) BSRF 2018" at 40.9,49.6 h1.5

## Silkscreen, mask and mechanical layers (free items; w line width, h text height)
Top Overlay:
  lines w0.2: 0.1,39.85 2.1,39.85 ; 0.1,69.95 2.1,69.95 ; 0.2,24.25 2.2,24.25 ; 0.2,54.55 2.2,54.55 ; 0.6,39.35 1.6,39.35 ; 0.6,69.45 1.6,69.45 ; 0.7,23.75 1.7,23.75 ; 0.7,54.05 1.7,54.05 ; 1,38.9 1.2,38.9 ; 1,69 1.2,69 ; 1.1,23.3 1.3,23.3 ; 1.1,39.85 1.1,41.35 1.1,40.85 ; 1.1,53.6 1.3,53.6 ; 1.1,69.95 1.1,71.45 1.1,70.95 ; 1.2,24.25 1.2,25.75 1.2,25.25 ; 1.2,54.55 1.2,56.05 1.2,55.55 ; 5.5,6.75 7.5,6.75 ; 6,6.25 7,6.25 ; 6.4,5.8 6.6,5.8 ; 6.5,6.75 6.5,8.25 6.5,7.75 ; 15.1,83.8 15.1,84 ; 15.55,83.4 15.55,84.4 ; 16.05,82.9 16.05,84.9 ; 16.05,83.9 17.55,83.9 17.05,83.9 ; 22.2,45.15 24.2,45.15 ; 22.7,44.65 23.7,44.65 ; 23.1,44.2 23.3,44.2 ; 23.2,45.15 23.2,46.65 23.2,46.15 ; 30.9,83.7 30.9,83.9 ; 31.35,83.3 31.35,84.3 ; 31.85,82.8 31.85,84.8 ; 31.85,83.8 33.35,83.8 32.85,83.8 ; 50.4,82.45 52.4,82.45 ; 50.9,81.95 51.9,81.95 ; 51.3,81.5 51.5,81.5 ; 51.4,82.45 51.4,83.95 51.4,83.45 ; 58.5,82.35 60.5,82.35 ; 59,81.85 60,81.85 ; 59.4,81.4 59.6,81.4 ; 59.5,82.35 59.5,83.85 59.5,83.35 ; 82.8,34.25 84.8,34.25 ; 82.9,9.35 84.9,9.35 ; 82.9,21.25 84.9,21.25 ; 82.9,45.25 84.9,45.25 ; 82.9,56.25 84.9,56.25 ; 82.9,67.45 84.9,67.45 ; 83.3,33.75 84.3,33.75 ; 83.4,8.85 84.4,8.85 ; 83.4,20.75 84.4,20.75 ; 83.4,44.75 84.4,44.75 ; 83.4,55.75 84.4,55.75 ; 83.4,66.95 84.4,66.95 ; 83.7,33.3 83.9,33.3 ; 83.8,8.4 84,8.4 ; 83.8,20.3 84,20.3 ; 83.8,34.25 83.8,35.75 83.8,35.25 ; 83.8,44.3 84,44.3 ; 83.8,55.3 84,55.3 ; 83.8,66.5 84,66.5 ; 83.9,9.35 83.9,10.85 83.9,10.35 ; 83.9,21.25 83.9,22.75 83.9,22.25 ; 83.9,45.25 83.9,46.75 83.9,46.25 ; 83.9,56.25 83.9,57.75 83.9,57.25 ; 83.9,67.45 83.9,68.95 83.9,68.45 ; 25.445,31.14 25.445,54.5 49,54.5 49,31.14 25.445,31.14 ; 51.6,27.9 51.6,35.6 71.7,35.6 71.7,27.9 51.6,27.9
  text "RxD" at 19,83.4 h0.8
  text "TxD" at 22.3,83.4 h0.8
  text "3.3V" at 25.7,83.3 h0.8
  text "DIO1" at 34.6,83.3 h0.8
  text "DIO2" at 38.1,83.3 h0.8
  text "3.3V" at 41.7,83.3 h0.8
  text "GND-->" at 11.7,82 h0.8 r180
  text "BOOT" at 54.5,81.4 h0.8 r90
  text "RES" at 62.4,81.3 h0.8 r90
  text "CLK" at 65,81.3 h0.8 r90
  text "DIO" at 67.5,81.3 h0.8 r90
  text "GND-->" at 73,80.9 h0.8
  text "IN" at 0.6,74.5 h0.8
  text "PWM1" at 84.2,73.4 h0.8 r90
  text "5V" at 84.3,70.4 h0.8 r90
  text "12V" at 0.2,64.9 h0.8
  text "PWM2" at 84.3,62.4 h0.8 r90
  text "5V" at 0.4,61.4 h0.8
  text "5V" at 84.3,59.7 h0.8 r90
  text "I1" at 0.5,57.9 h0.8
  text "PWM3" at 84.3,51.6 h0.8 r90
  text "INT1" at 49.5,50.3 h0.8
  text "12V" at 0.2,50 h0.8
  text "5V" at 83.2,49 h0.8
  text "INT2" at 49.5,47.8 h0.8
  text "5V" at 0.5,46.3 h0.8
  text "INT3" at 49.5,45.1 h0.8
  text "I2" at 0.6,43 h0.8
  text "3.3V" at 22,42.5 h0.8
  text "INT4" at 49.5,42.2 h0.8
  text "PWM4" at 84.2,40.6 h0.8 r90
  text "SDA" at 22.1,40 h0.8
  text "5V" at 83.2,37.9 h0.8
  text "SCL" at 22.1,37.4 h0.8
  text "A1" at 49.5,34.9 h0.8
  text "12V" at 0.2,34.8 h0.8
  text "A2" at 49.5,32.2 h0.8
  text "5V" at 0.6,31.2 h0.8
  text "SeaTurtle I/O  /    V1.0 / (c) BSRF 2018" at 52.3,28.5 h1.5
  text "Vin" at 84.2,28.3 h0.8 r90
  text "I3" at 0.8,28 h0.8
  text "PPWM1" at 84.3,23.6 h0.8 r90
  text "+" at 6,17 h2
  text "Vin" at 84.1,16.2 h0.8 r90
  text "PPWM2" at 84.2,11.8 h0.8 r90
  text "12-18V" at 1.5,10.4 h0.8 r90
  text "GND-->" at 11.8,3.6 h0.8 r180
  text "GND-->" at 73.7,2.9 h0.8
Mechanical 4:
  the board outline again, w0.2